# Altium PCB valix_PCB1_Layout1.PcbDoc (part 1 of 3)
Units mil, origin at the board's own origin, x right, y up, seen from the top; angles counter-clockwise.
Board outline 4500 x 2000 mil, 10 copper layers (Top Layer, L2 IntP, L3 Sig, L4 IntP GND, L5 Sig, L6 IntP GND, L7 IntP pwr, L8 Sig, L9 IntP GND, Bottom Layer), stack 81.302 mil thick; 152 components, 166 nets, 818 pads, 544 vias.
Unrouted connection lines stored in the file: 42.
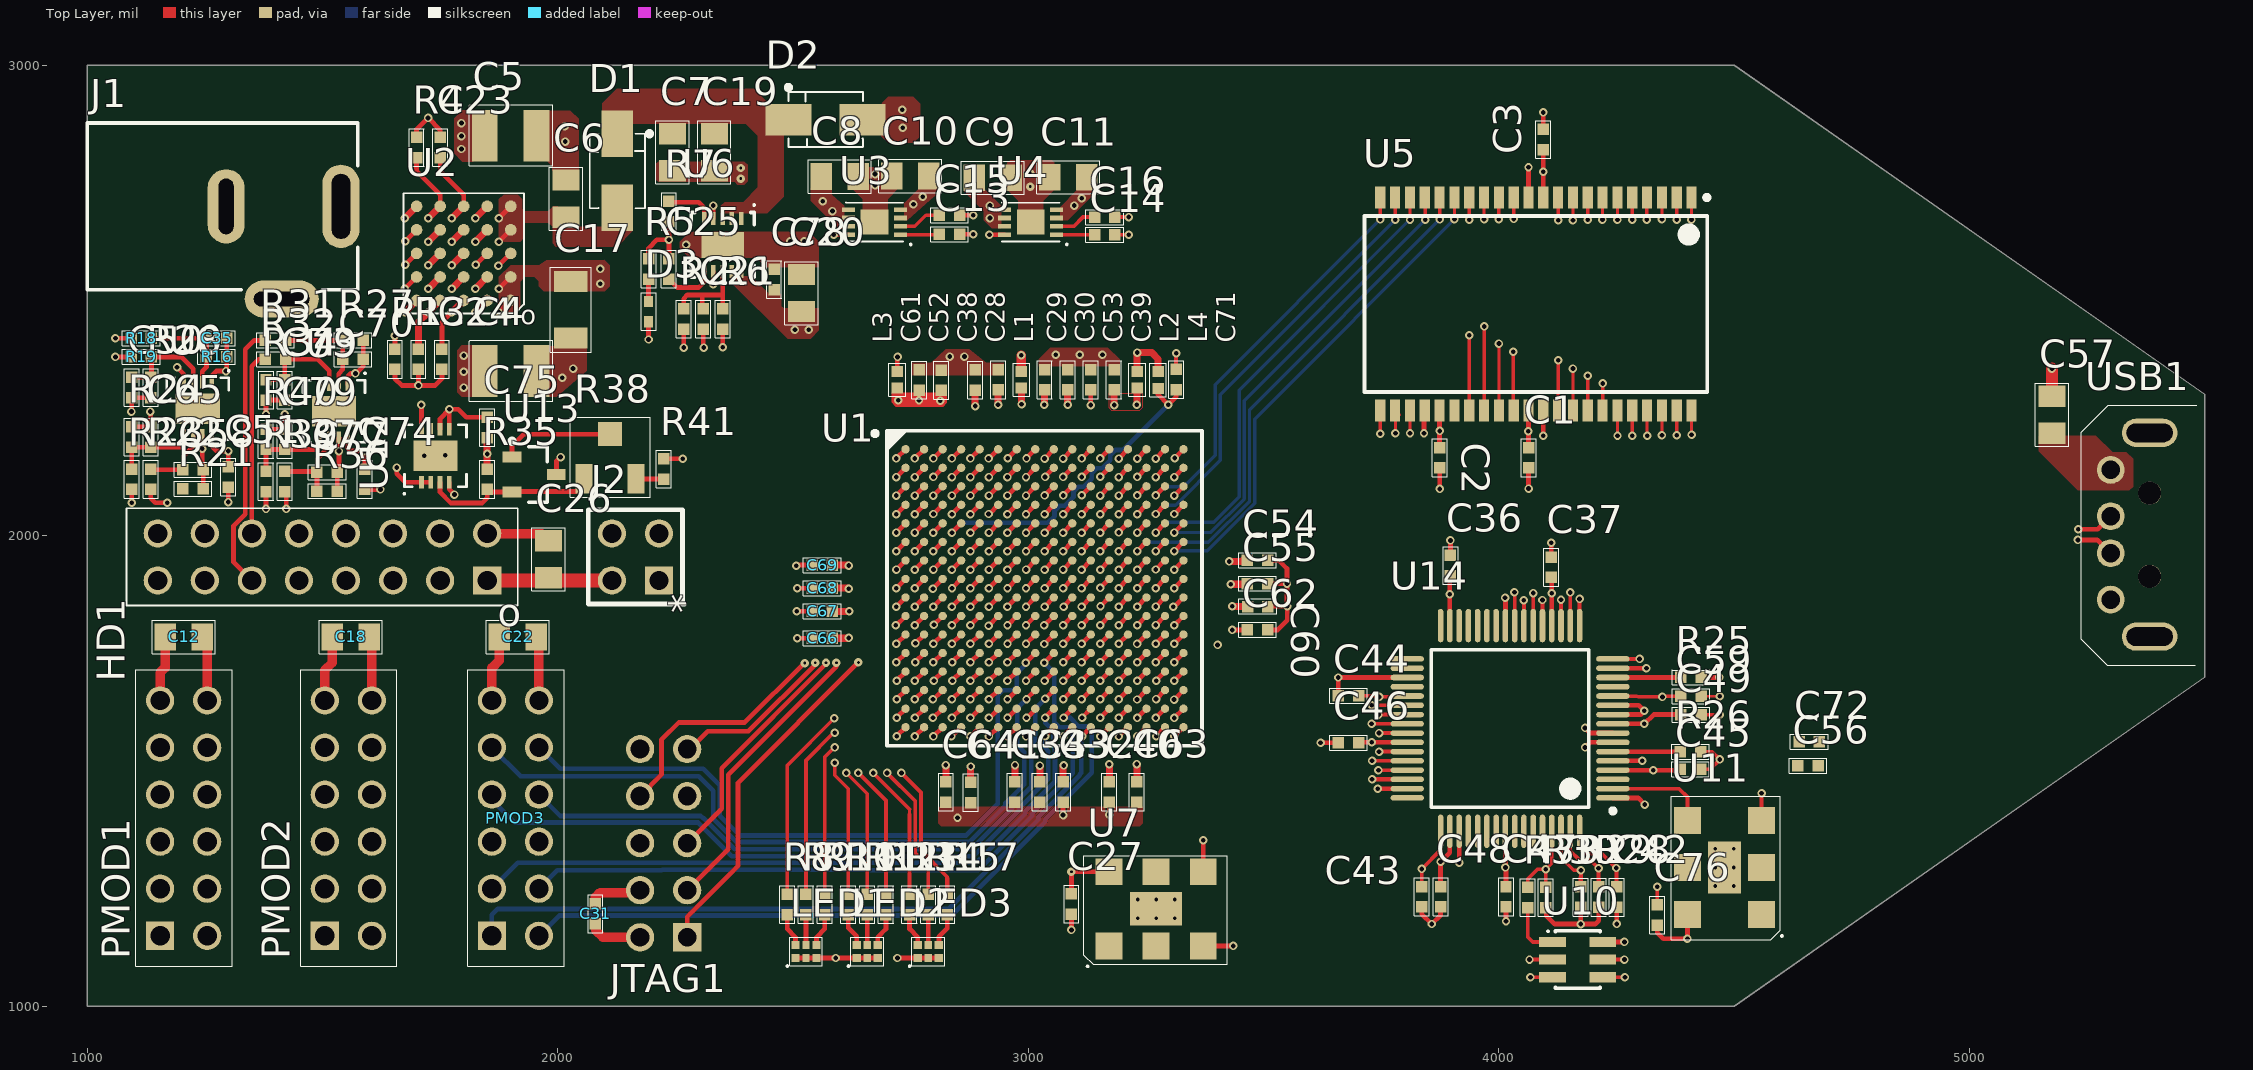
[diagram p0: Top Layer view]
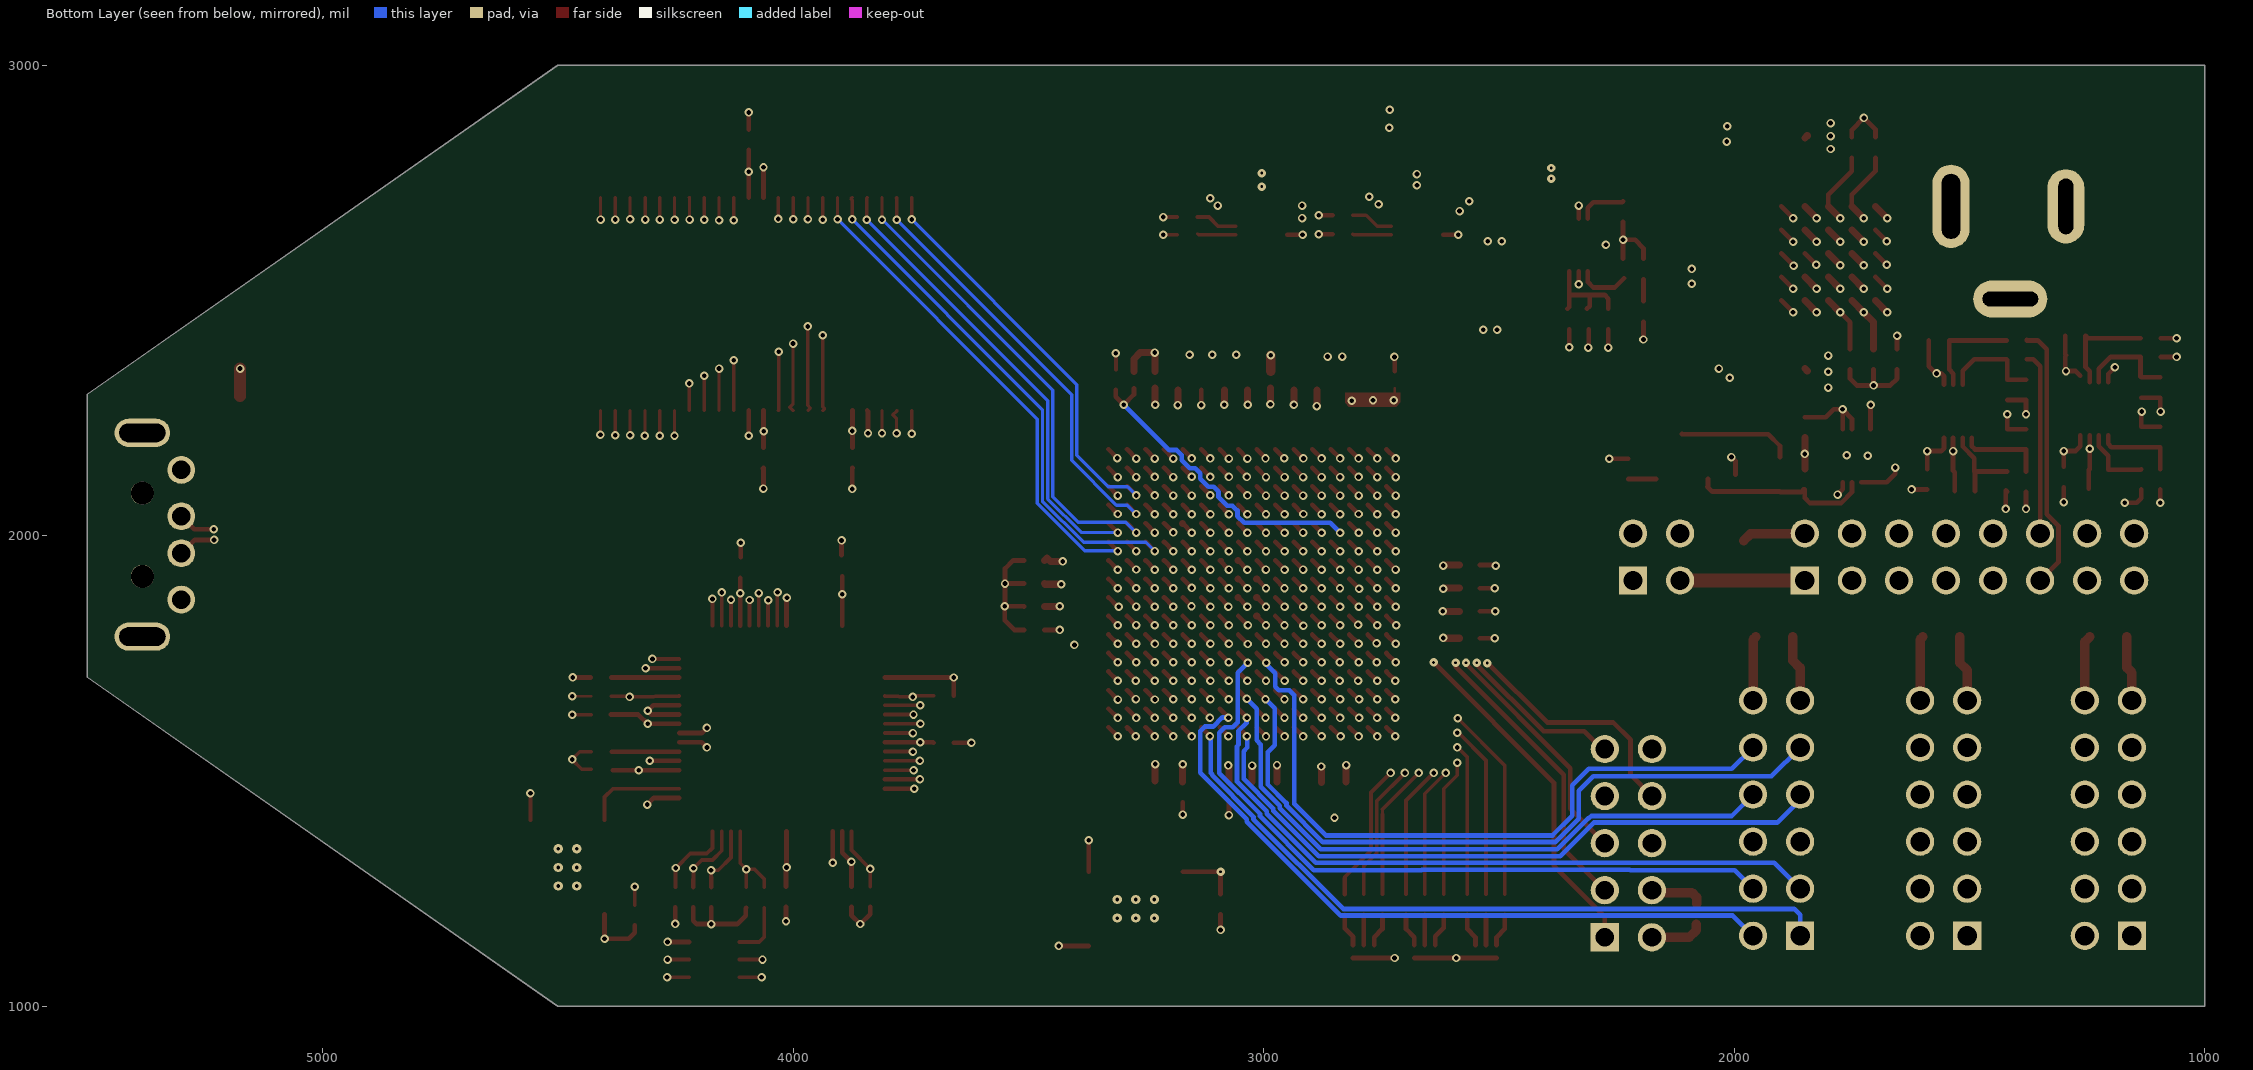
[diagram p1: Bottom Layer view, seen from below]
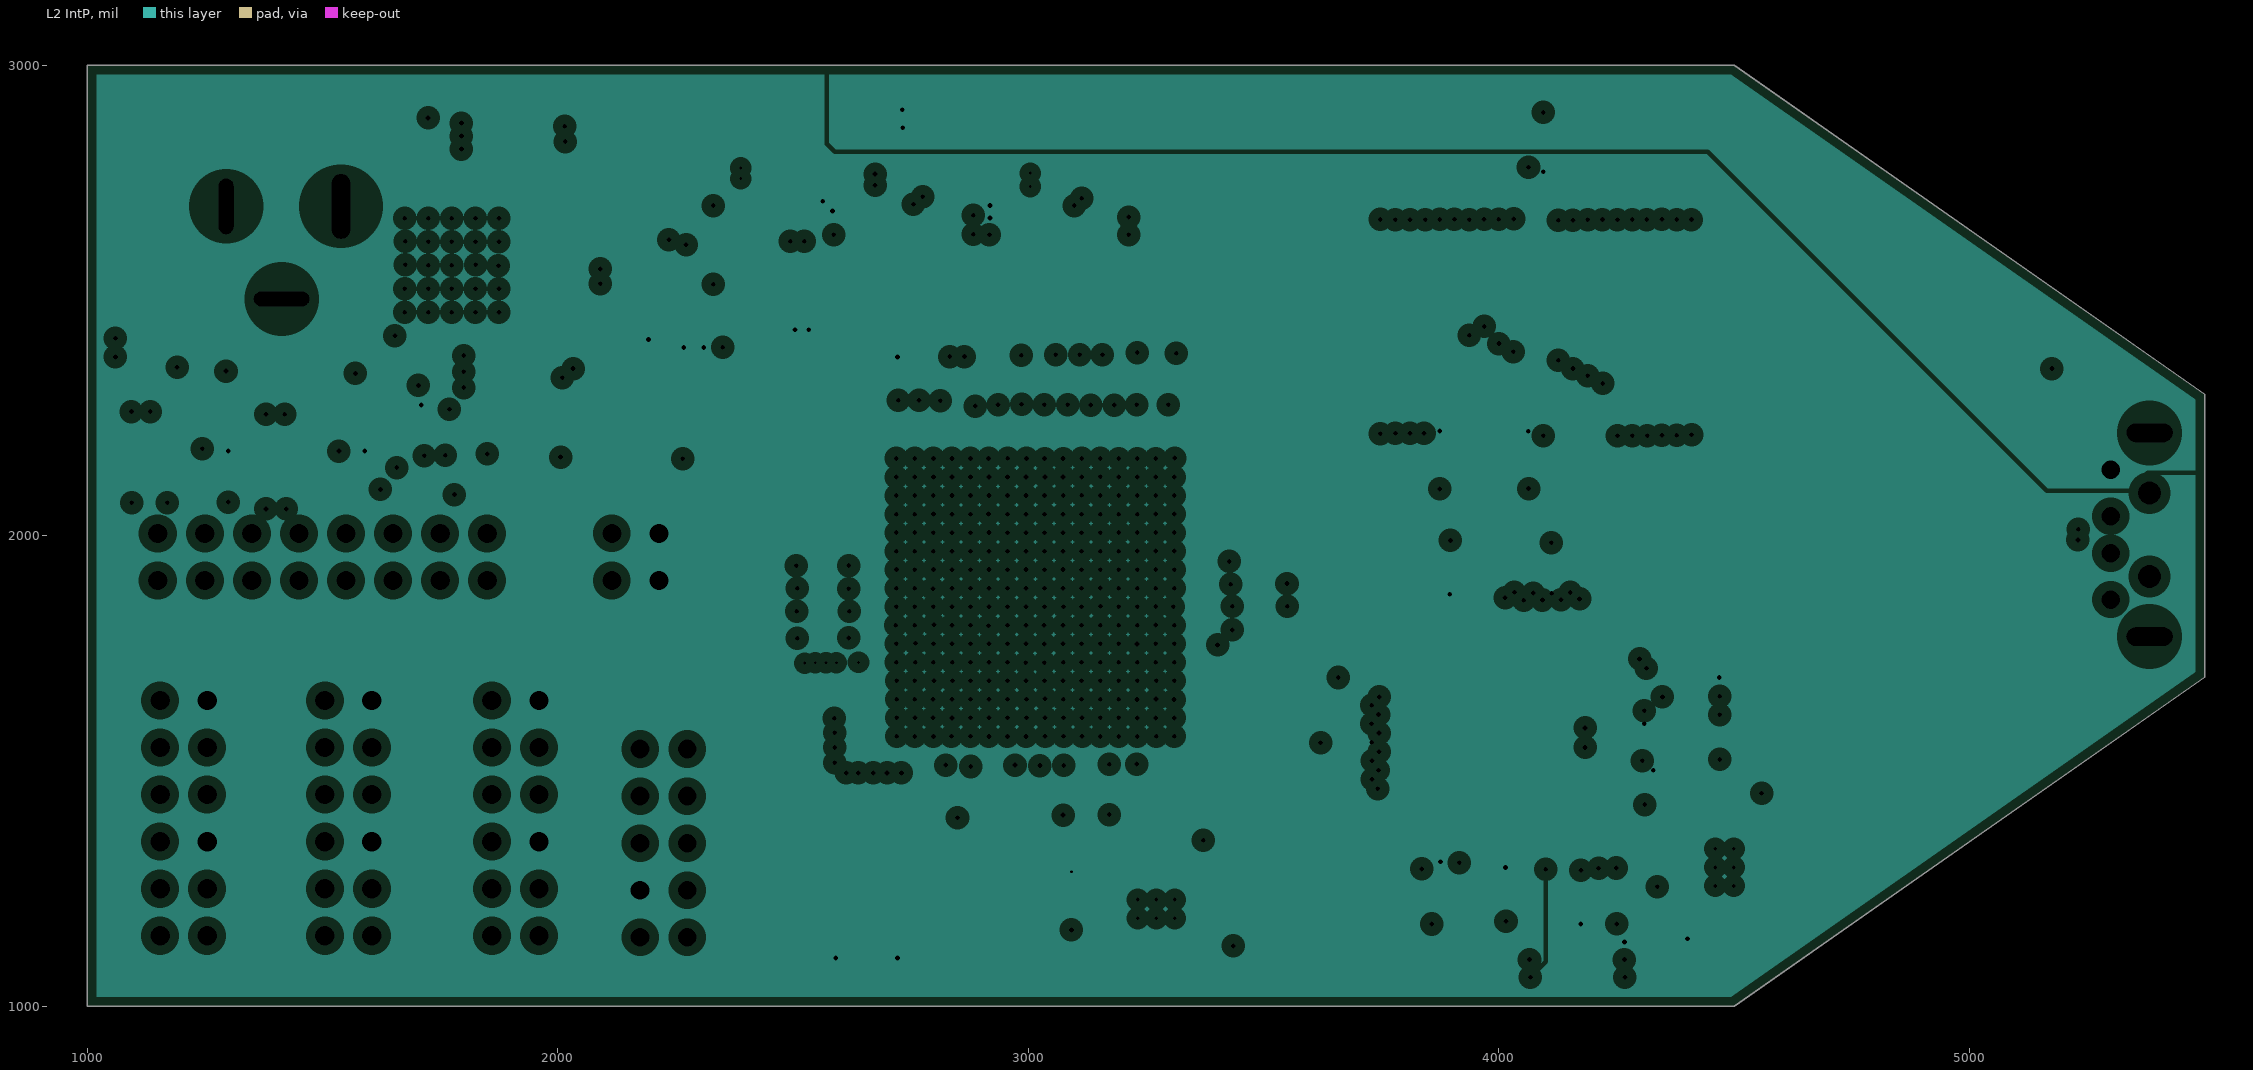
[diagram p2: L2 IntP, clearances drawn from the general rule]
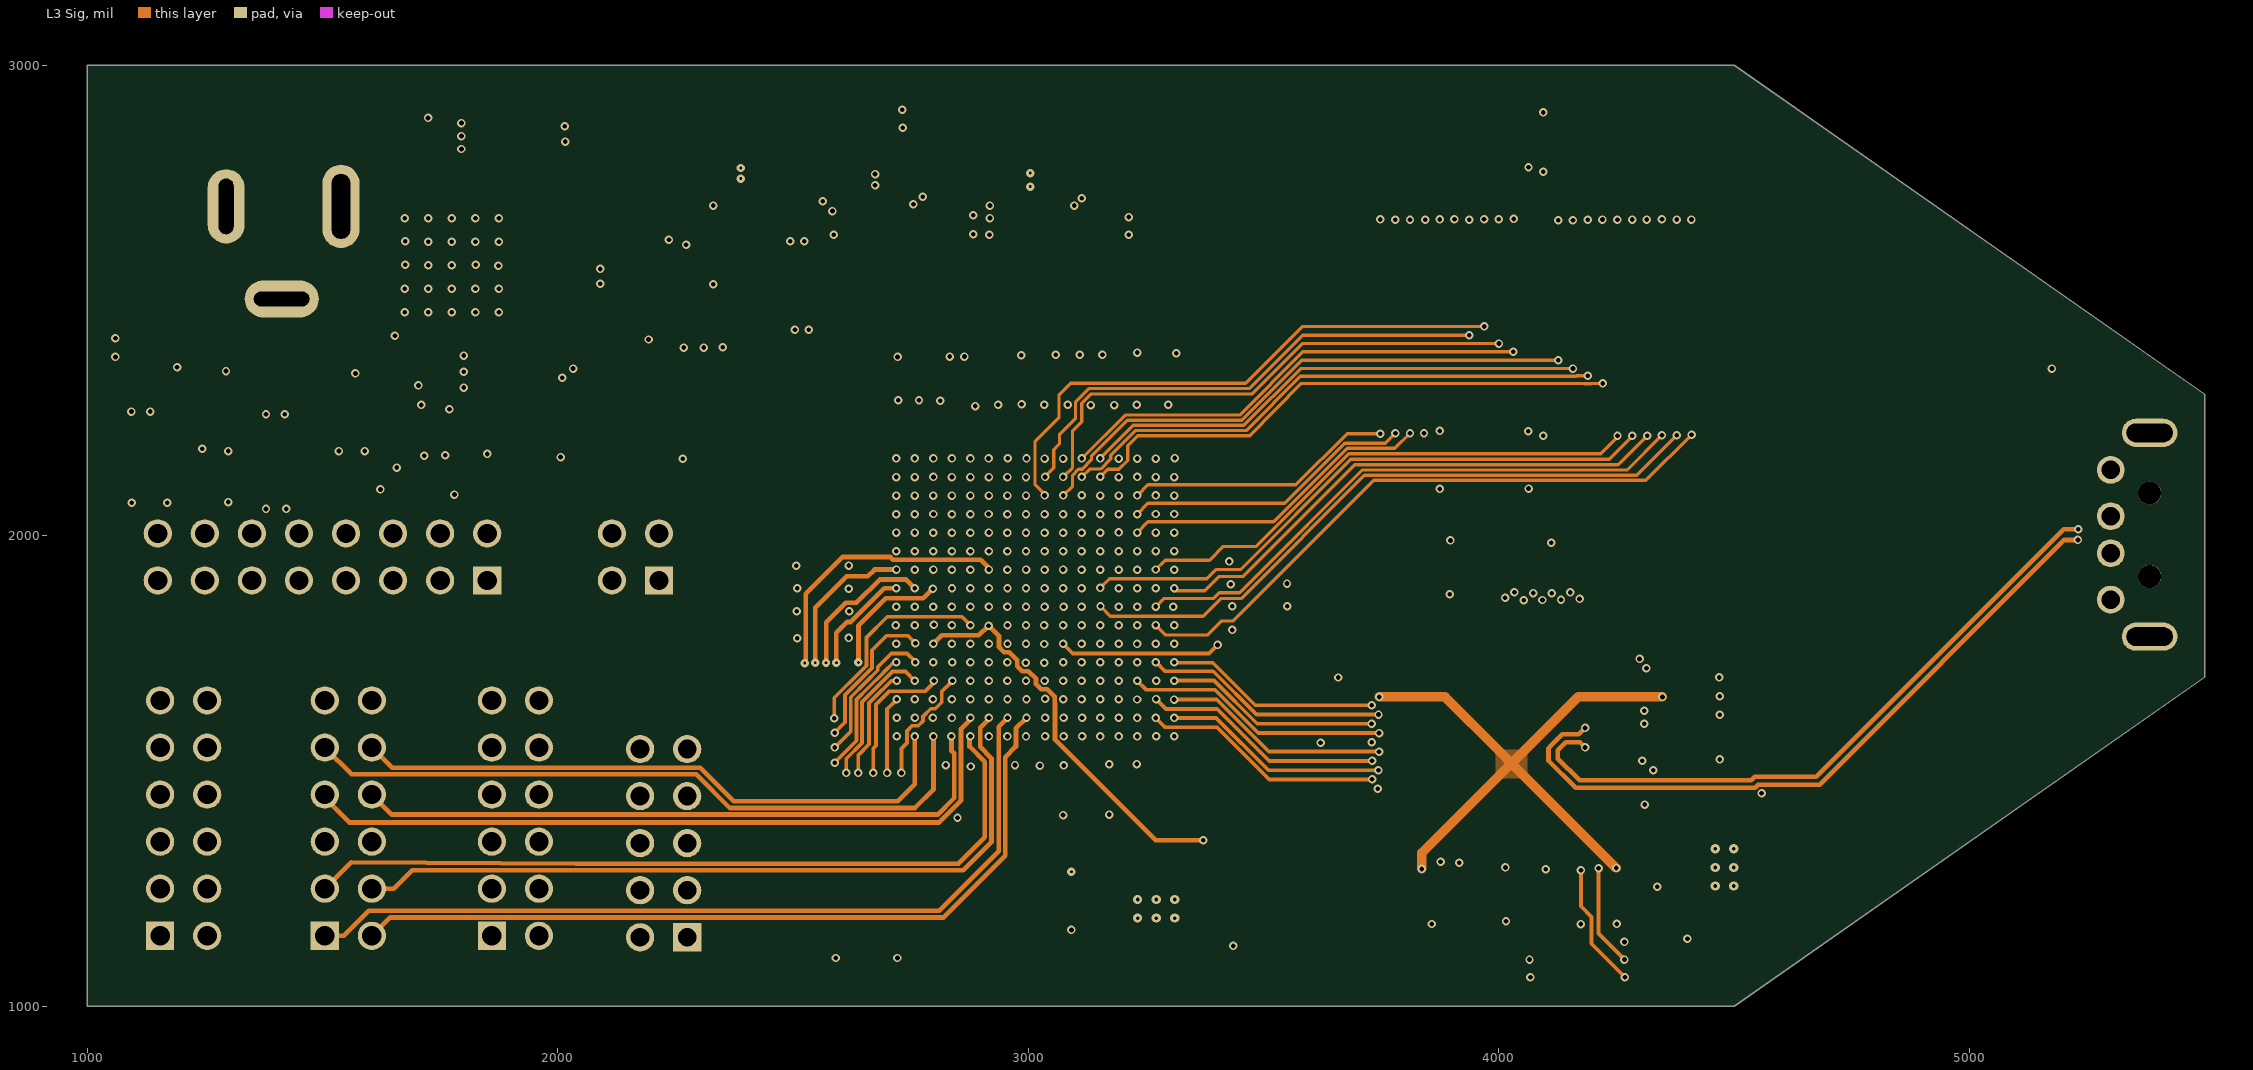
[diagram p3: L3 Sig]
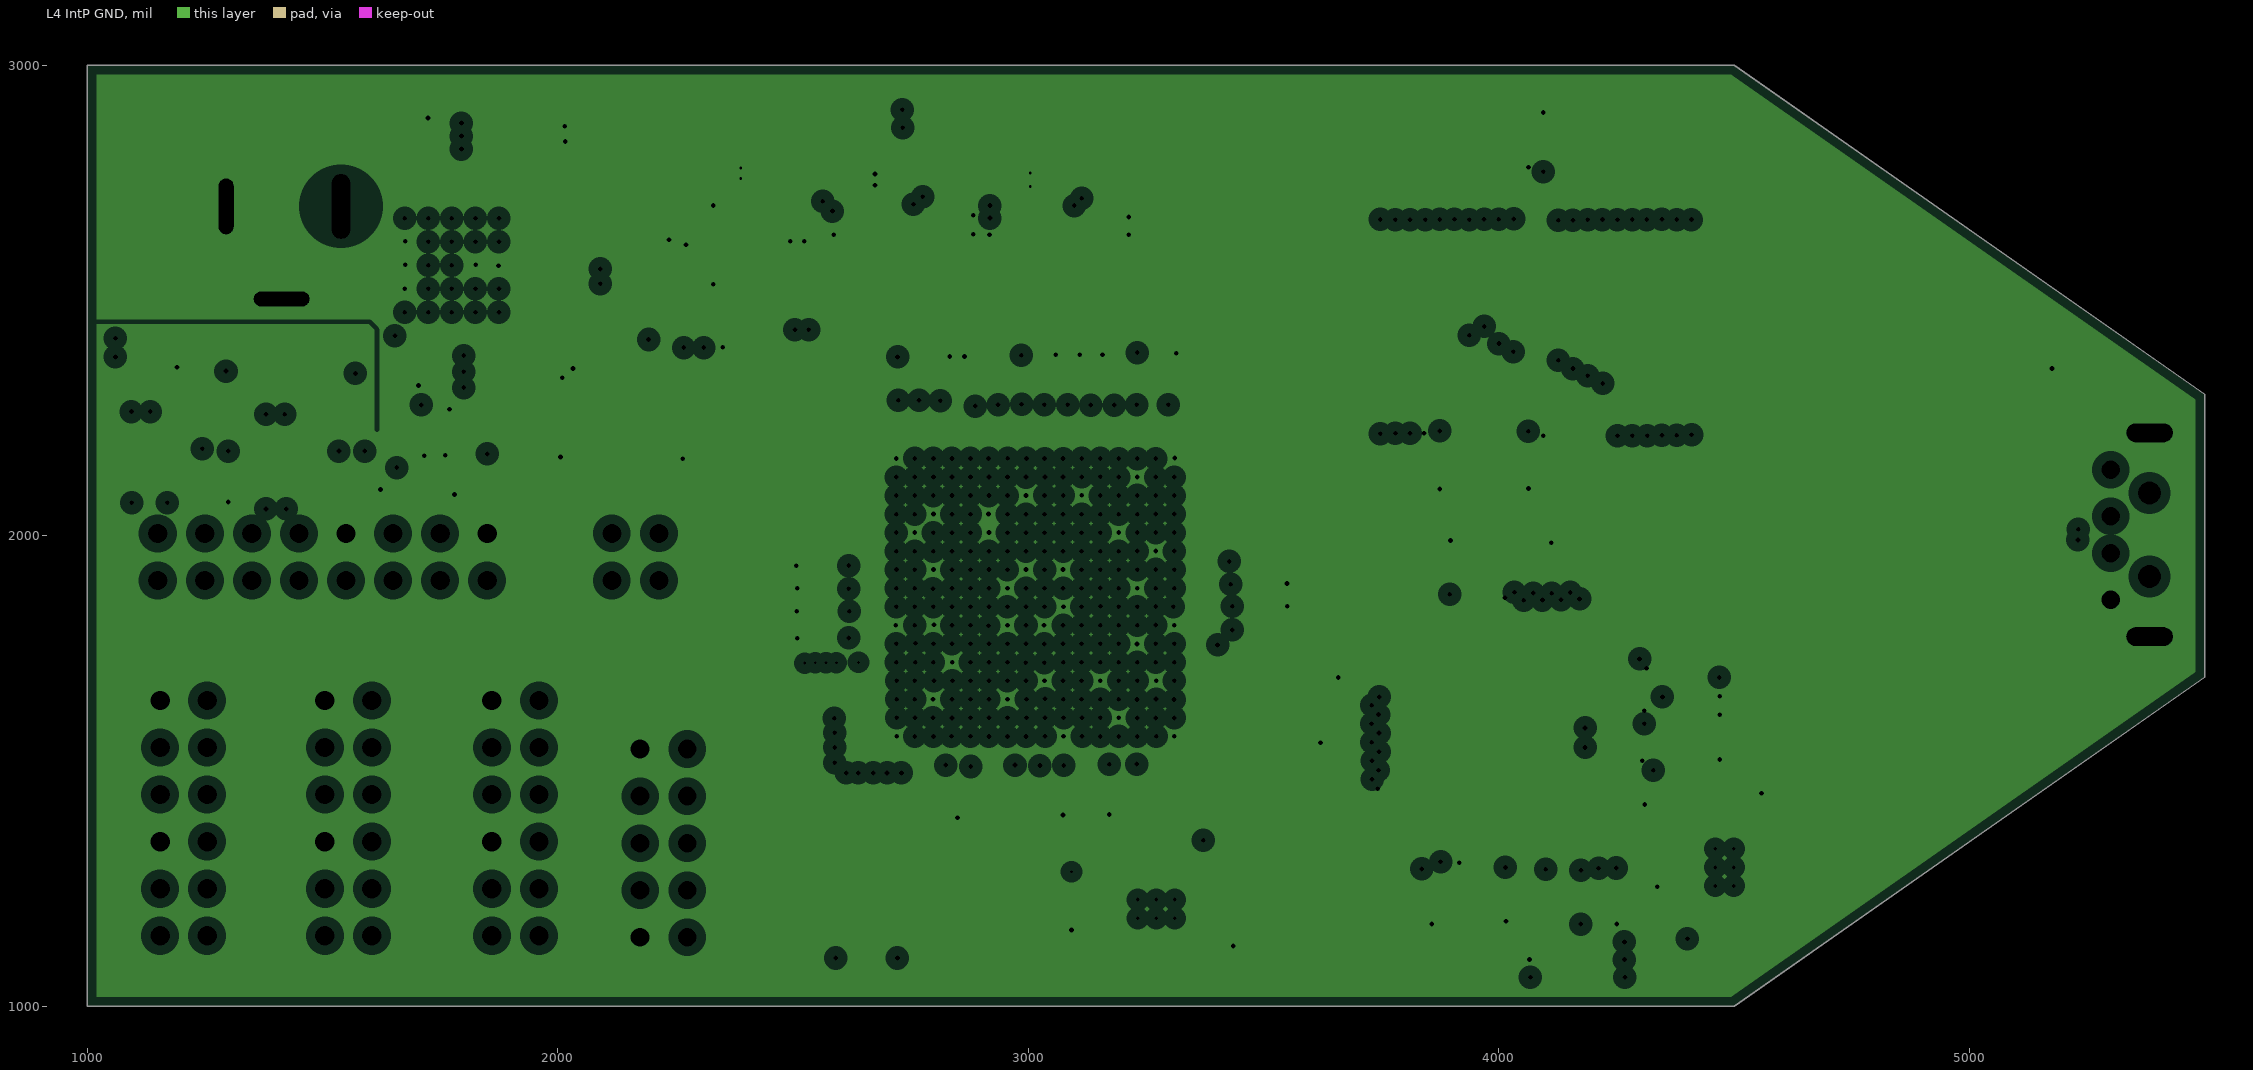
[diagram p4: L4 IntP GND, clearances drawn from the general rule]
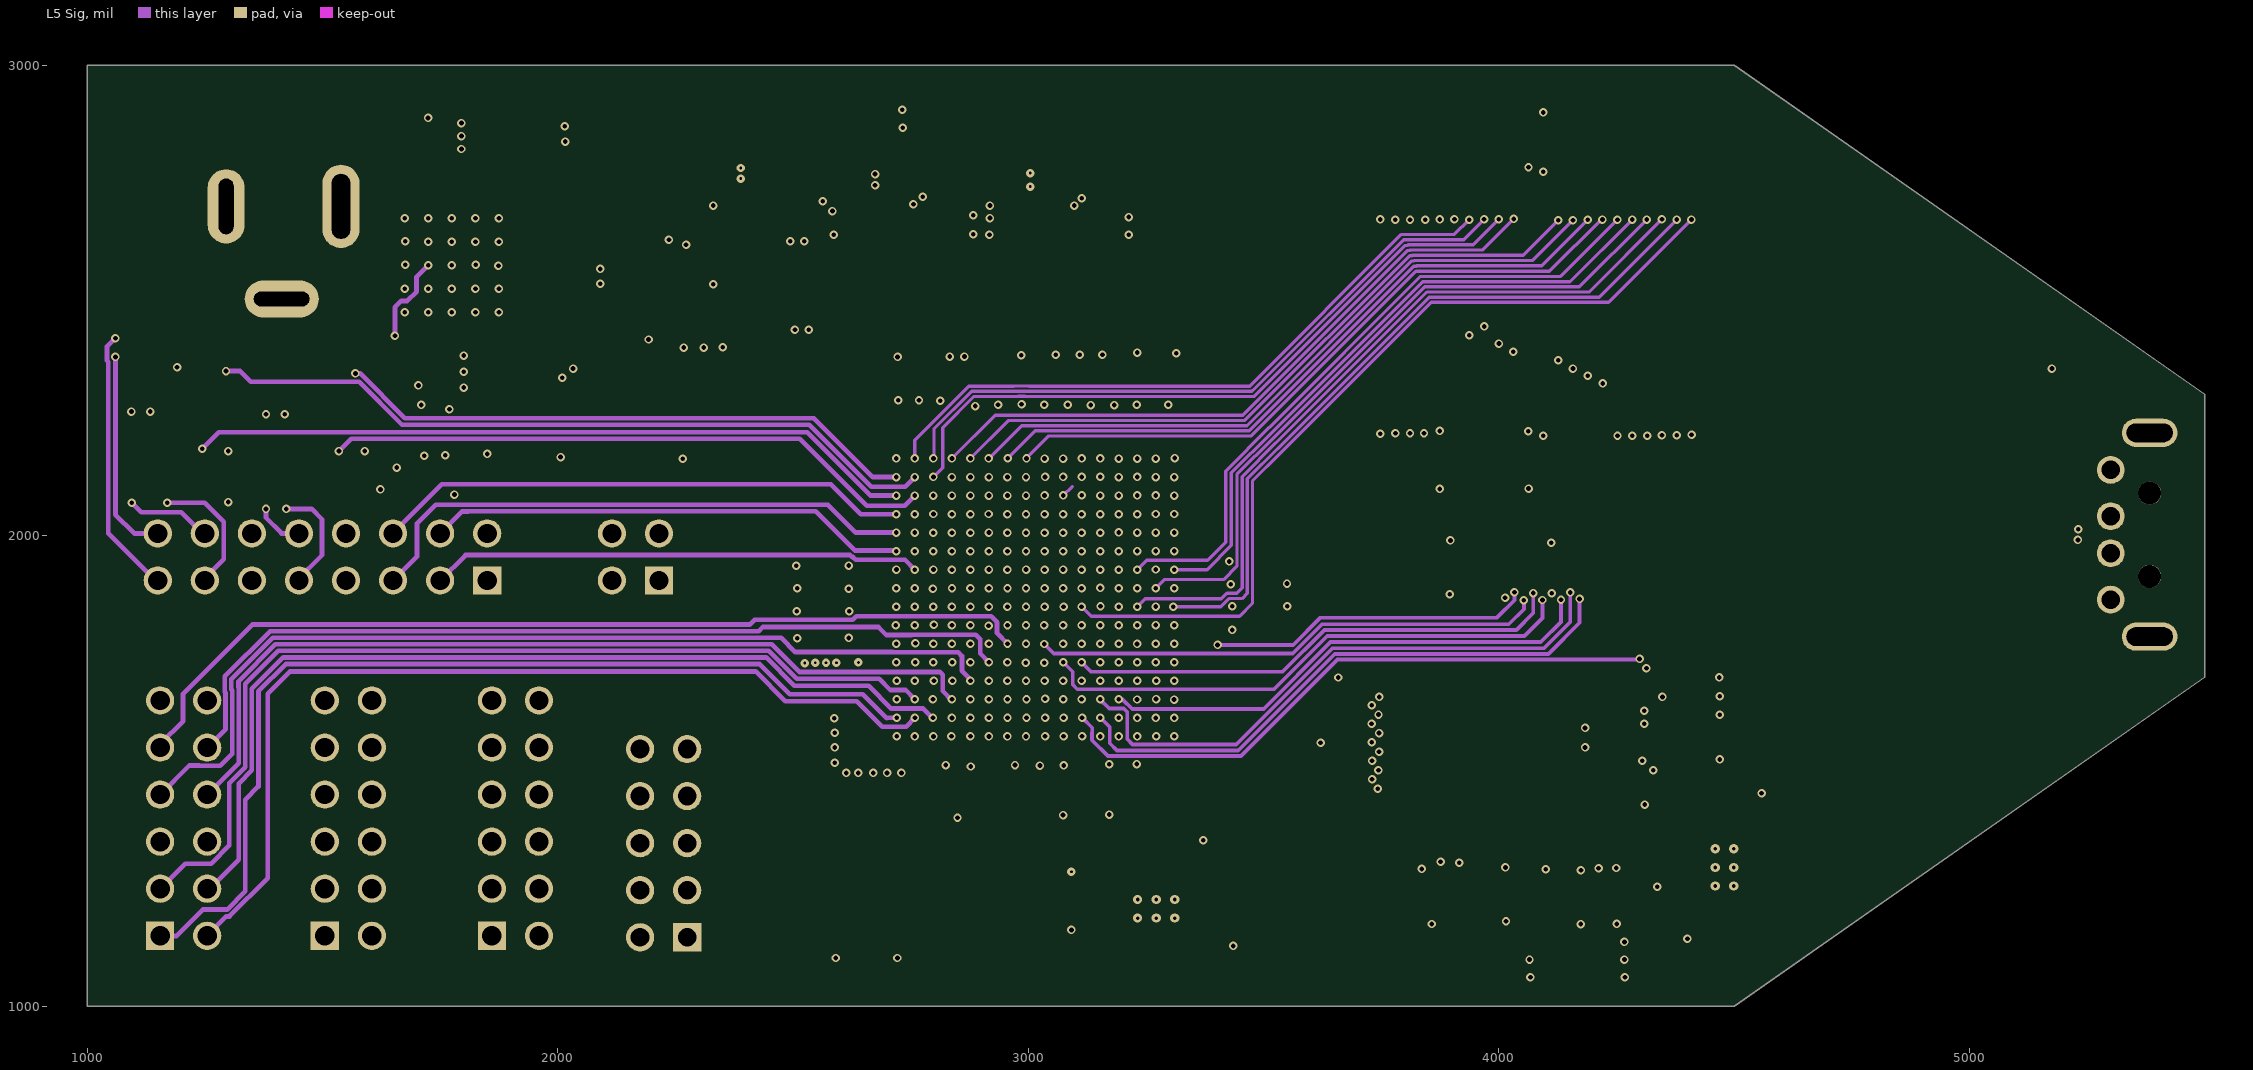
[diagram p5: L5 Sig]
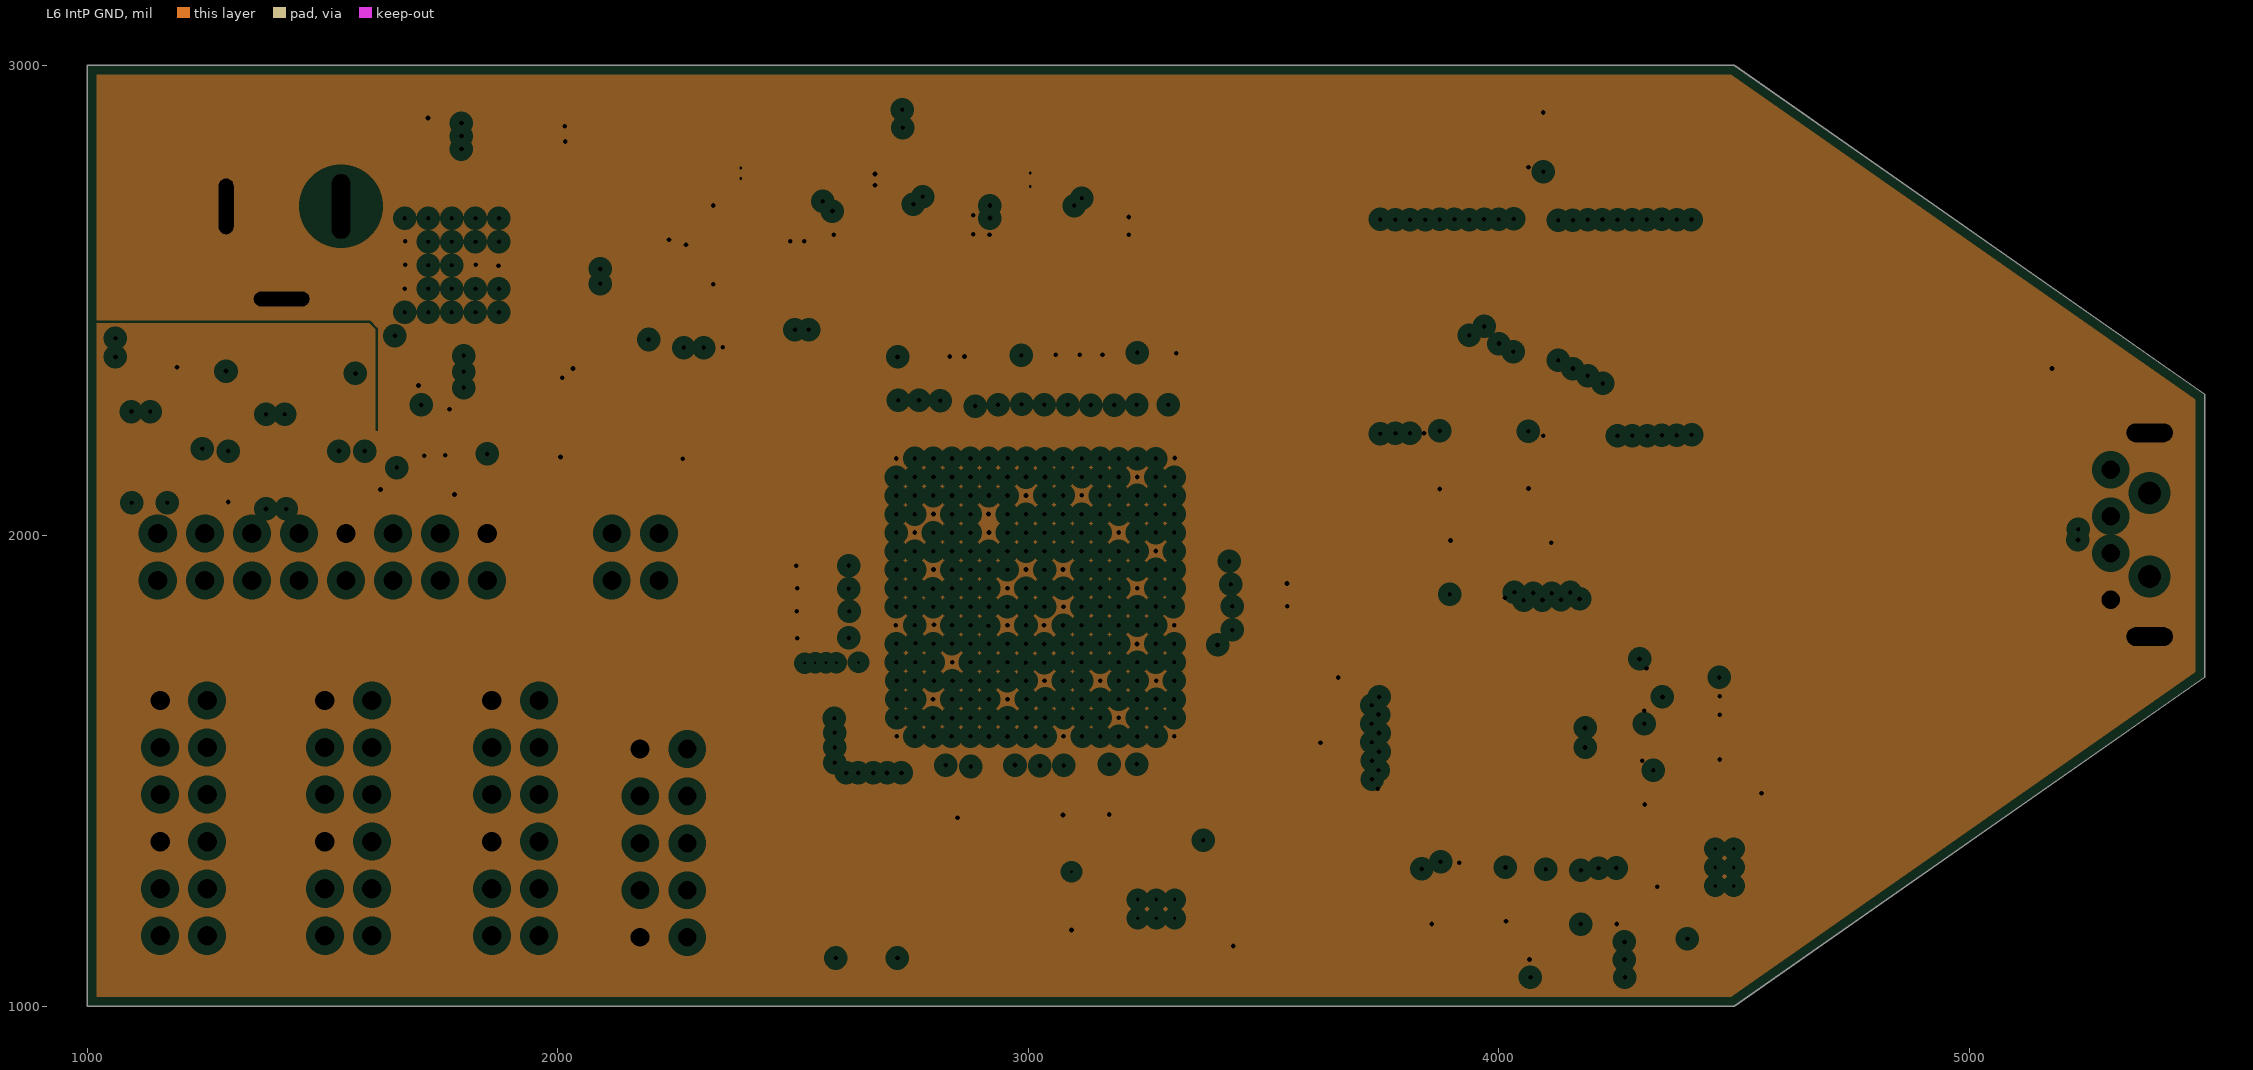
[diagram p6: L6 IntP GND, clearances drawn from the general rule]
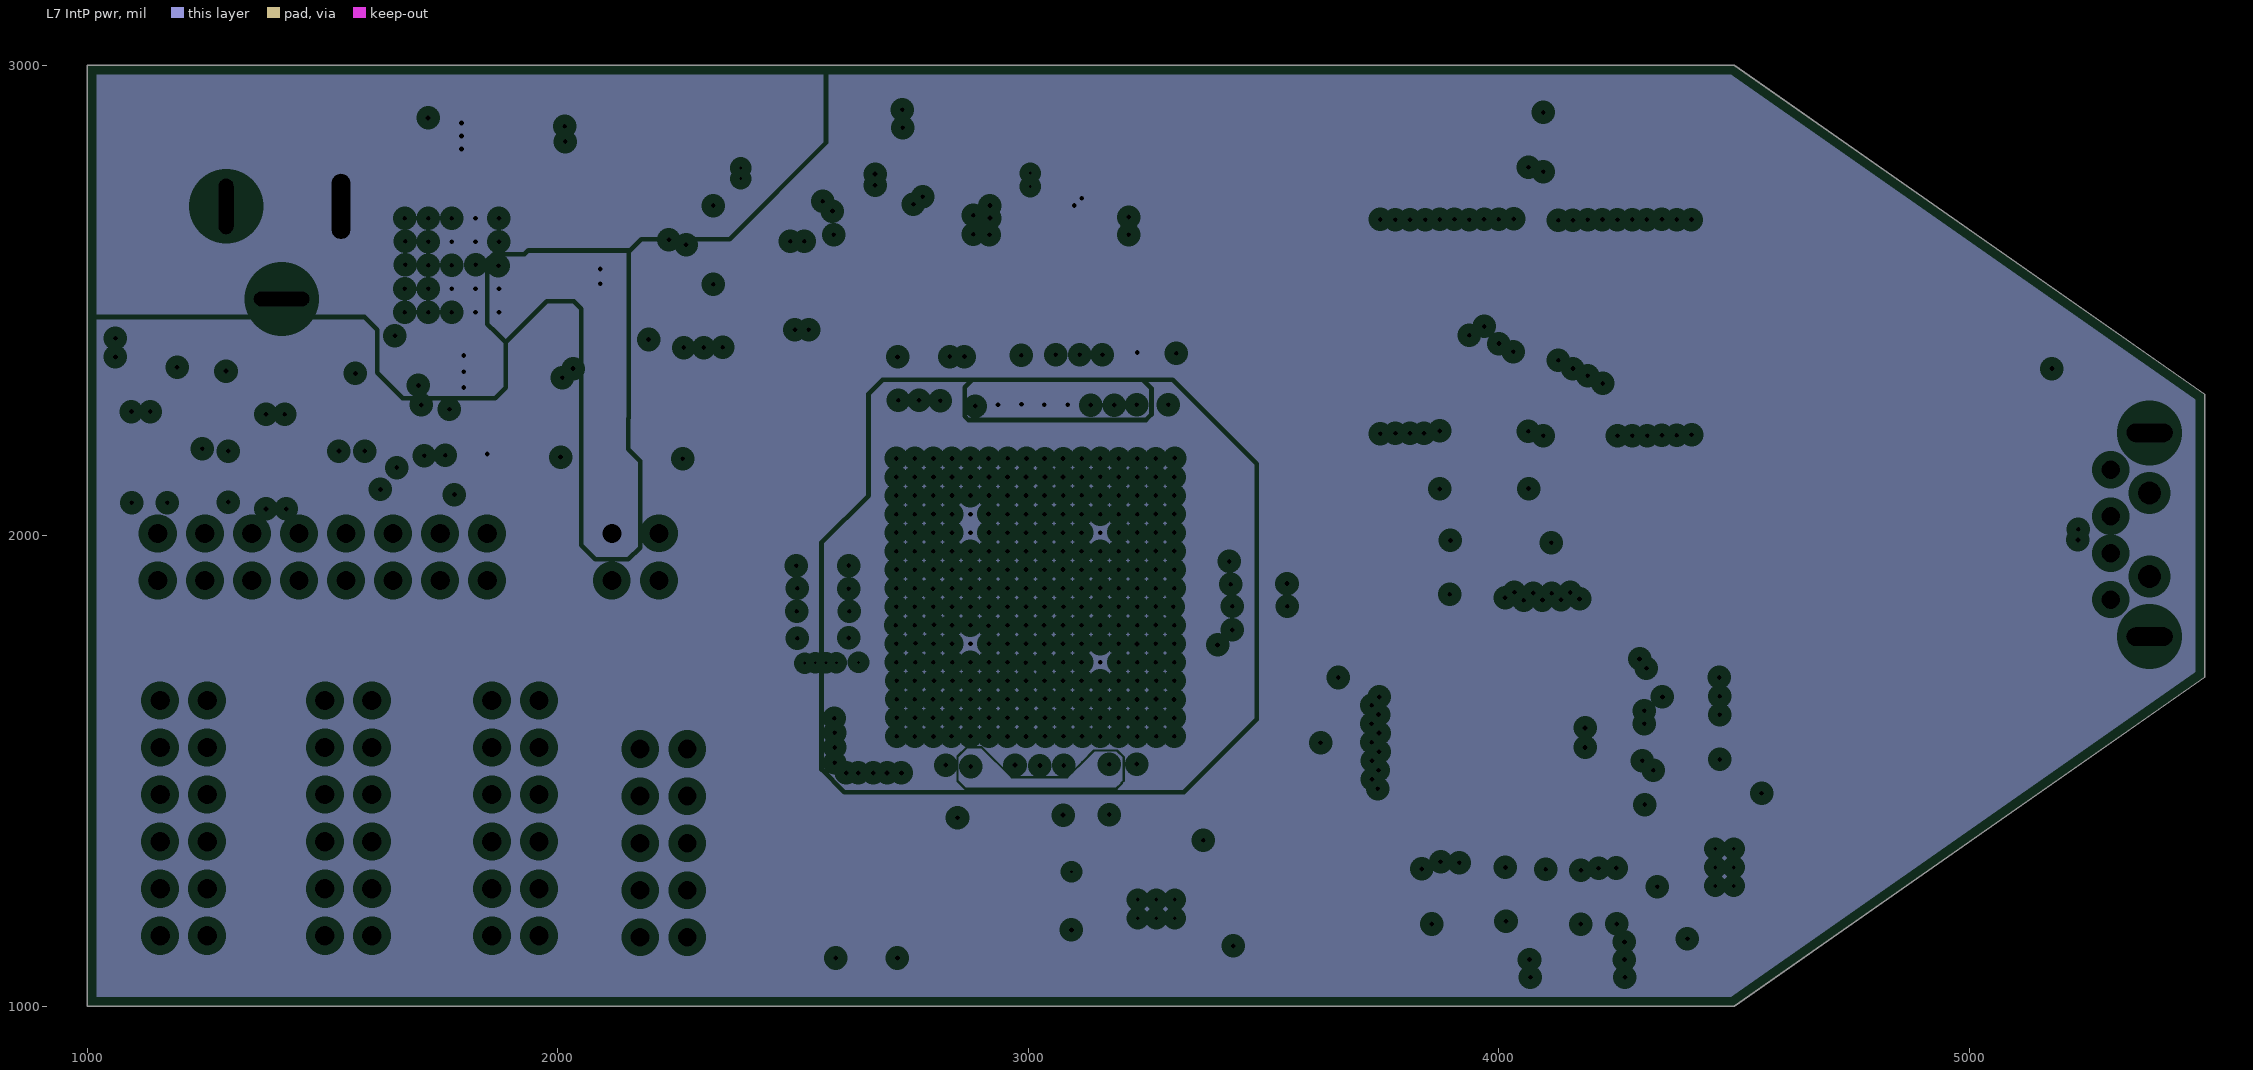
[diagram p7: L7 IntP pwr, clearances drawn from the general rule]
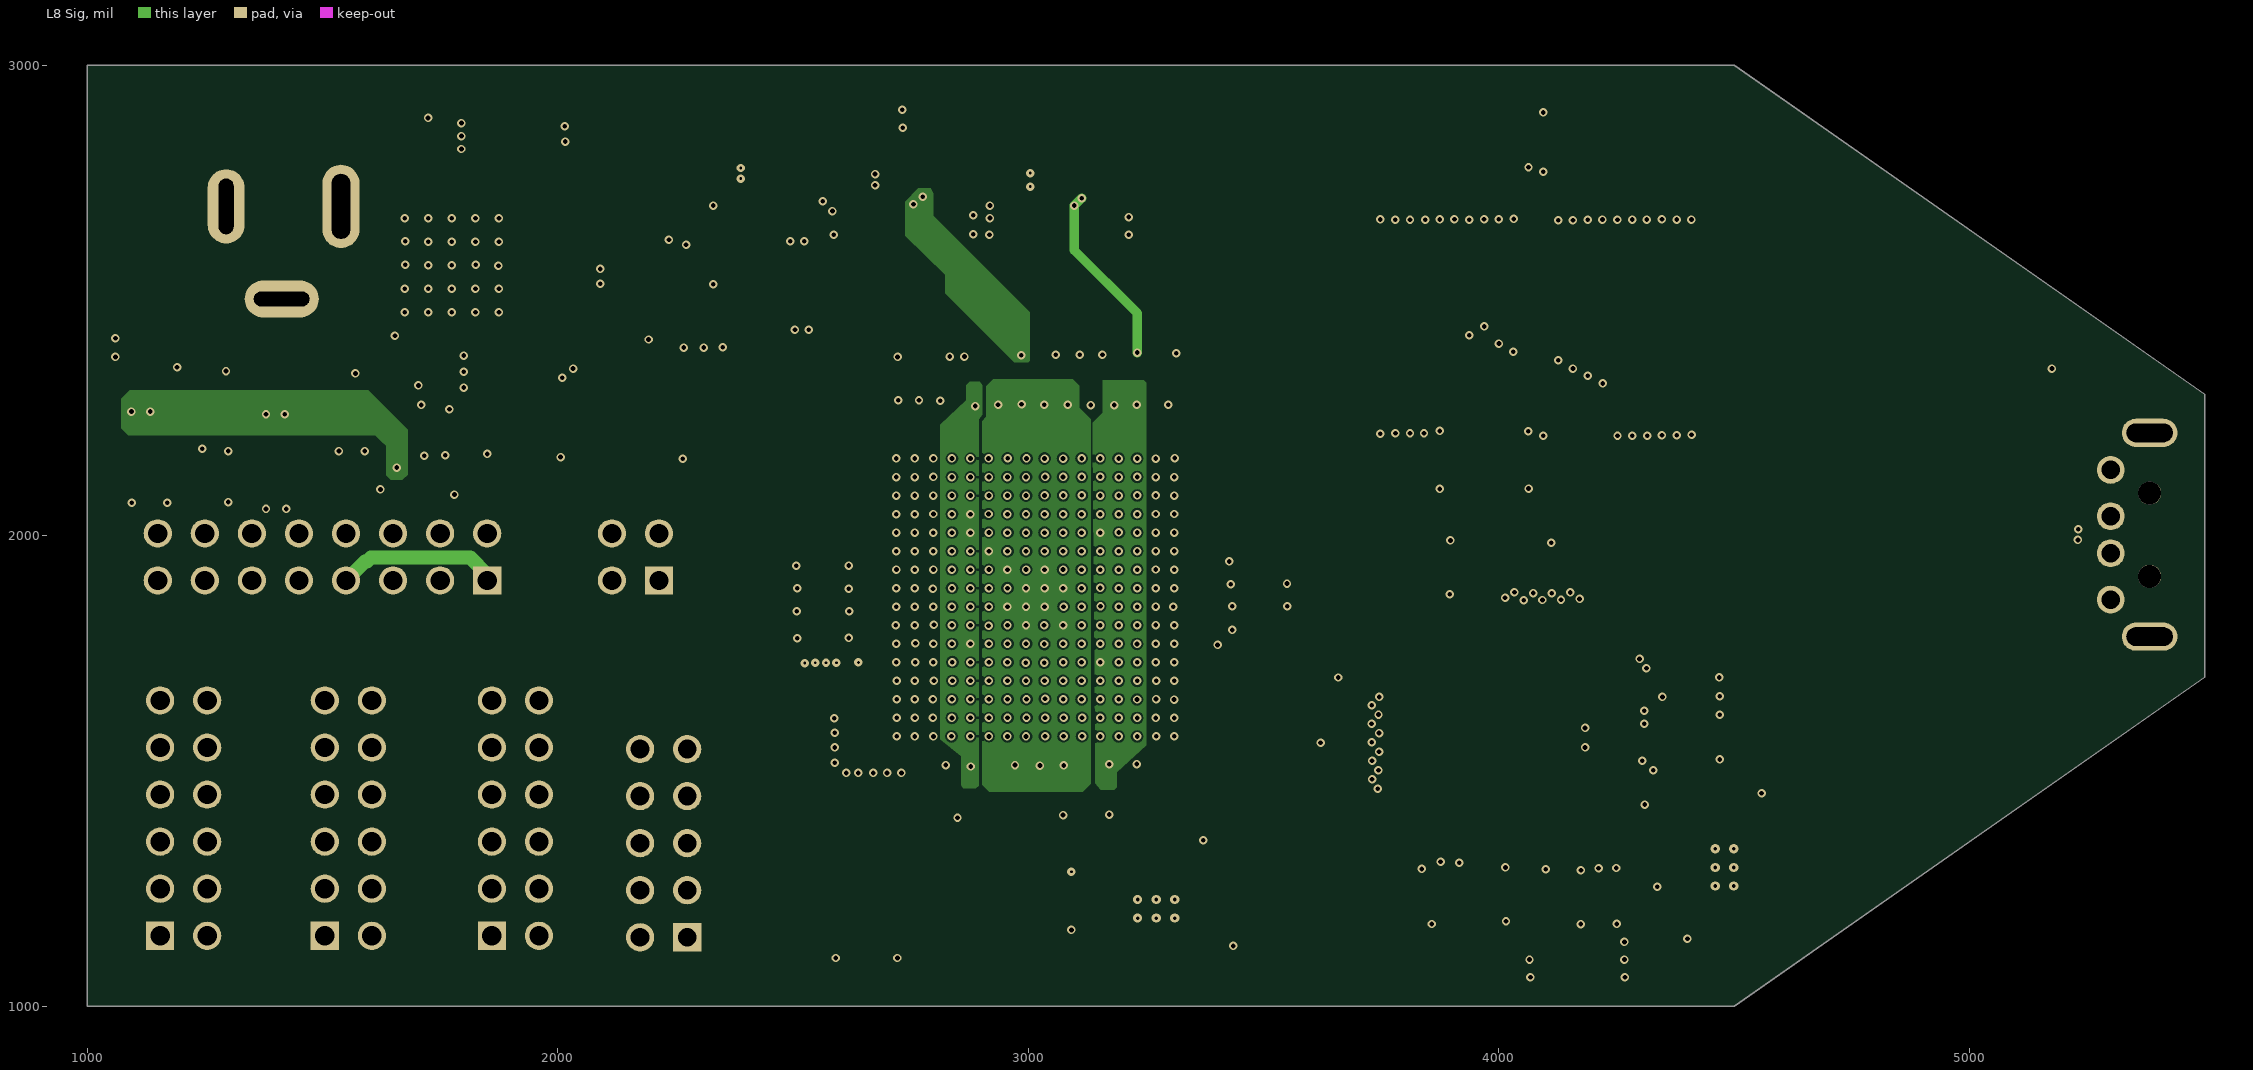
[diagram p8: L8 Sig]
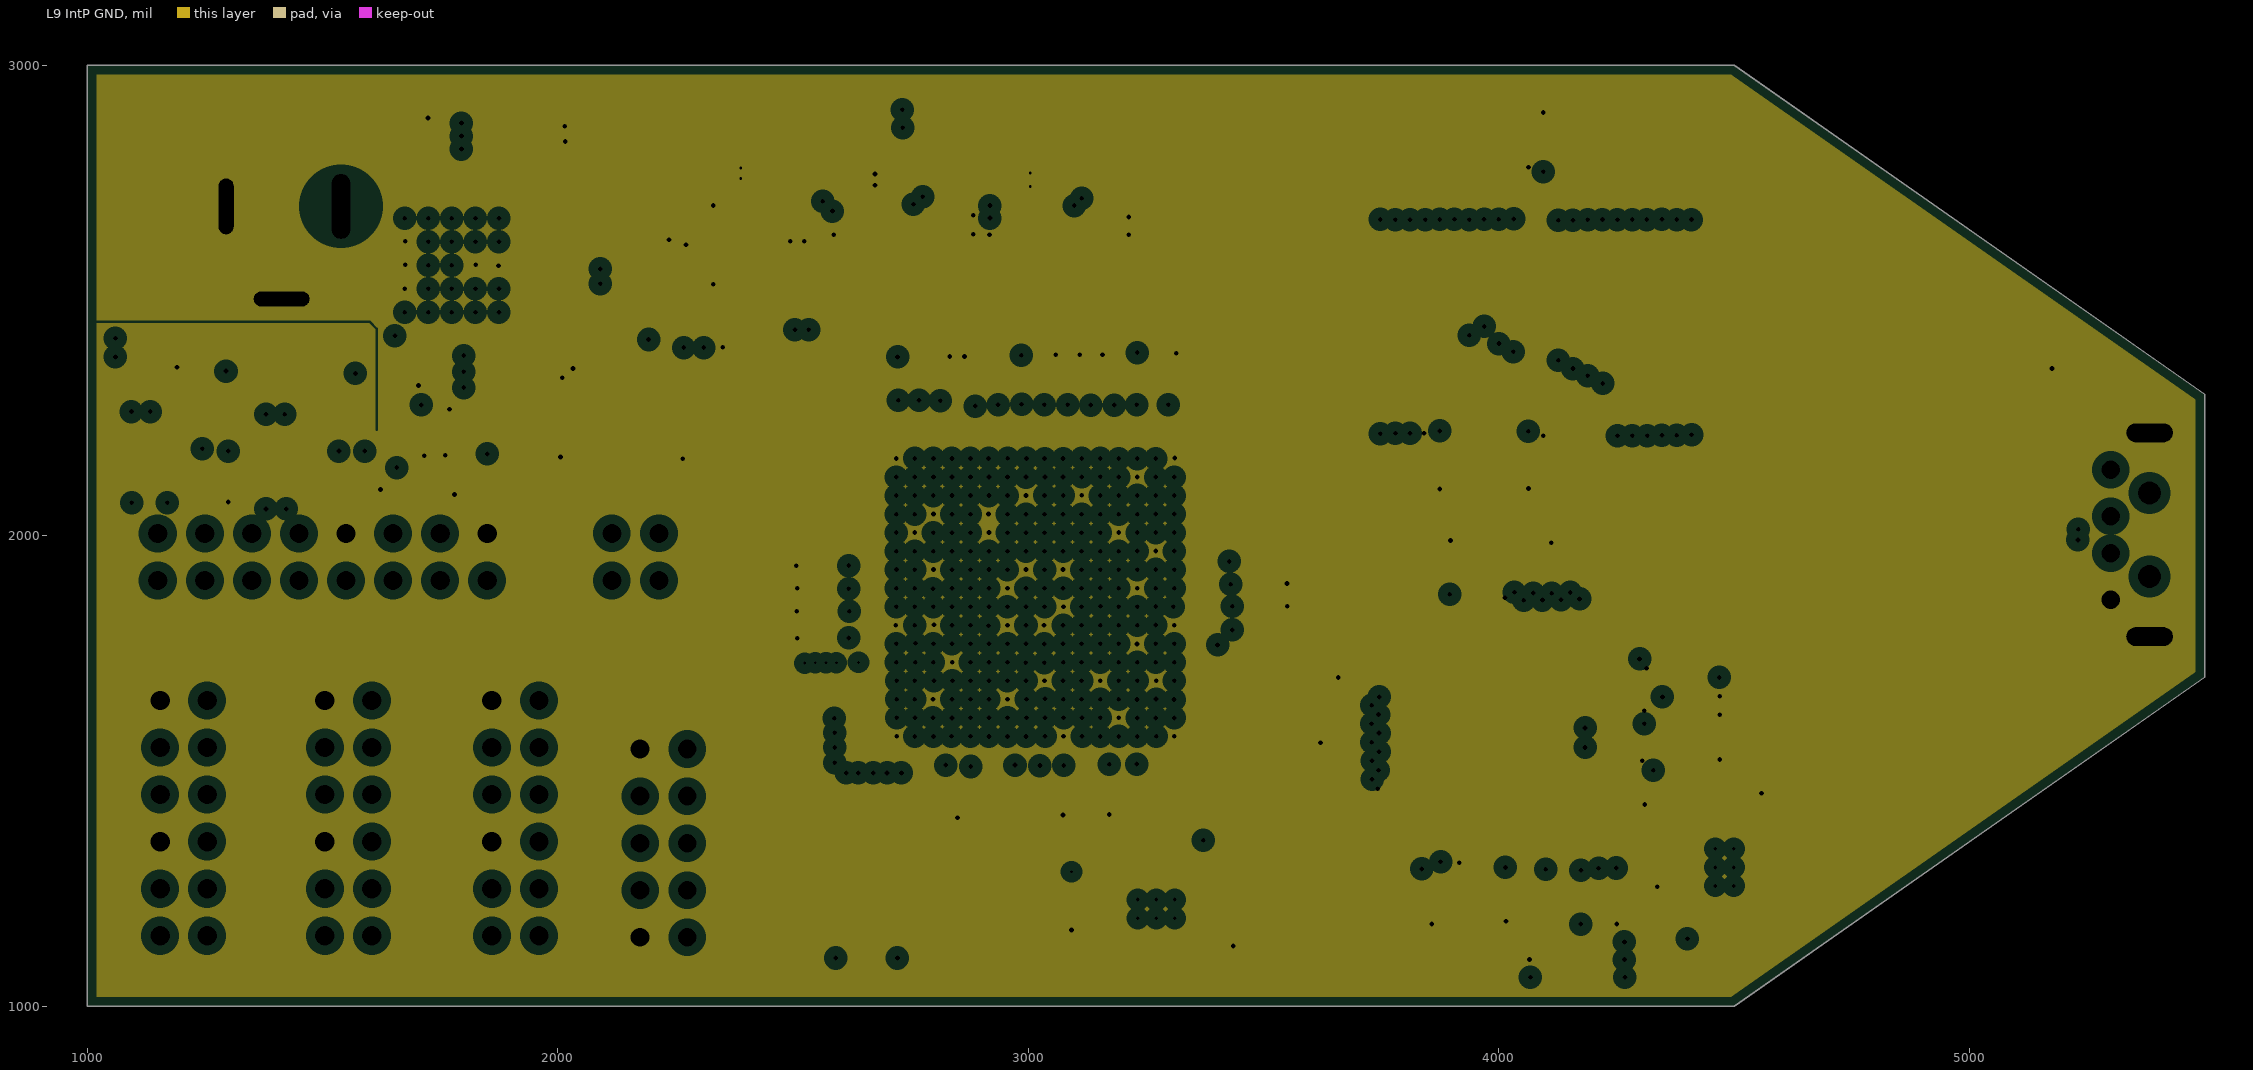
[diagram p9: L9 IntP GND, clearances drawn from the general rule]

## Layer stack, top to bottom
Top Solder: solder mask 0.4, Solder Resist, Dk 3.5
Top Layer: signal copper 0.7
Dielectric 1: core 10, FR-4, Dk 4.2
L2 IntP: plane copper 1.417, net (Multiple Nets)
Dielectric 2: core 10, Dk 4.2
L3 Sig: signal copper 1.417
Dielectric 3: prepreg 5, Dk 4.2
L4 IntP GND: plane copper 1.417, net GND
Dielectric 4: prepreg 5, Dk 4.2
L5 Sig: signal copper 0.7
Dielectric 5: core 10, Dk 4.2
L6 IntP GND: plane copper 1.417, net GND
Dielectric 6: prepreg 5, Dk 4.2
L7 IntP pwr: plane copper 1.417, net (Multiple Nets)
Dielectric 7: core 10, Dk 4.2
L8 Sig: signal copper 0.7
Dielectric 8: prepreg 5, Dk 4.2
L9 IntP GND: plane copper 1.417, net GND
Dielectric 9: core 10, Dk 4.2
Bottom Layer: signal copper 0.7
Bottom Solder: solder mask 0.4, Solder Resist, Dk 3.5

## Board outline
1000,1000 1000,3000 4500,3000 5500,2300 5500,1700 4500,1000

## Design rules (kind name [scope] priority, off if disabled: settings)
Clearance [All] p1: gap=4
DiffPairsRouting [All] p1: maxlimit=10 minlimit=7 mostfreqgap=7 toplayer_minwidth=8 toplayer_maxwidth=15 toplayer_prefwidth=10 midlayer1_minwidth=8 midlayer1_maxwidth=15 midlayer1_prefwidth=10 midlayer2_minwidth=8 midlayer2_maxwidth=15 midlayer2_prefwidth=10 midlayer3_minwidth=8 midlayer3_maxwidth=15 midlayer3_prefwidth=10 bottomlayer_minwidth=8 bottomlayer_maxwidth=15 bottomlayer_prefwidth=10 maxuncoupledlength=500
HoleSize [All] p1: absolutevalues=TRUE maxlimit=100 minlimit=10 maxpercent=80.000 minpercent=20.000
PlaneClearance PlaneClearance_1 [All] p1: clearance=20
PlaneConnect PlaneConnect_2p5FPGA [IsVia and InNet('2P5V_FPGA')] p1: planeconnectstyle=Direct reliefexpansion=20 reliefentries=4 reliefconductorwidth=10 reliefairgap=10
PlaneConnect PlaneConnect_5VINT [IsVia and InNet('5VINT')] p2: planeconnectstyle=Direct reliefexpansion=20 reliefentries=4 reliefconductorwidth=10 reliefairgap=10
PlaneConnect PlaneConnect_vbuss [IsVia and InNet('VBUSS')] p3: planeconnectstyle=Direct reliefexpansion=20 reliefentries=4 reliefconductorwidth=10 reliefairgap=10
PlaneConnect PlaneConnect_vbuss_hole [IsPad and InNet('GND')] p4: planeconnectstyle=Relief reliefexpansion=20 reliefentries=4 reliefconductorwidth=20 reliefairgap=10
PlaneConnect PlaneConnect_gnd [IsVia and InNet('GND') or IsPad and InNet ('GND')] p5: planeconnectstyle=Direct reliefexpansion=20 reliefentries=4 reliefconductorwidth=10 reliefairgap=10
PlaneConnect PlaneConnect_3p3FPGA [IsVia and InNet('3P3V_FPGA')] p6: planeconnectstyle=Direct reliefexpansion=20 reliefentries=4 reliefconductorwidth=10 reliefairgap=10
PlaneConnect PlaneConnect_PWR [InNetClass('All Nets')] p7: planeconnectstyle=Direct reliefexpansion=20 reliefentries=4 reliefconductorwidth=10 reliefairgap=10
PlaneConnect PlaneConnect_General [All] p8: planeconnectstyle=Relief reliefexpansion=20 reliefentries=4 reliefconductorwidth=10 reliefairgap=10
PolygonConnect PolygonConnect_Net [IsPad and InNetClass('SMTNets') Or IsPad and InNet ('SMTNets') or IsPad and InNet('4.5V') or IsPad and InNet('5VINT')] p1: connectstyle=Direct reliefconductorwidth=10 reliefentries=4 polygonreliefangle="90 Angle" airgapwidth=10
PolygonConnect PolygonConnect_gnd [IsVia and InNet('GND') Or IsPad and InNet ('GND')] p2: connectstyle=Direct reliefconductorwidth=10 reliefentries=4 polygonreliefangle="90 Angle" airgapwidth=10
PolygonConnect PolygonConnect_1p2FPGA [IsVia and InNet('1P2V_FPGA') or IsPad and InNet('1.2V') or IsVia and InNet('1.2V')] p3: connectstyle=Direct reliefconductorwidth=10 reliefentries=4 polygonreliefangle="90 Angle" airgapwidth=10
PolygonConnect PolygonConnect_vREFid [IsVia and InNet('VREF_ID')] p4: connectstyle=Direct reliefconductorwidth=10 reliefentries=4 polygonreliefangle="90 Angle" airgapwidth=10
PolygonConnect PolygonConnect_5vint [IsVia and InNet('5VINT') or IsVia and InNet('5V_USB') or IsPad and InNet('5V_USB')] p5: connectstyle=Direct reliefconductorwidth=10 reliefentries=4 polygonreliefangle="90 Angle" airgapwidth=10
PolygonConnect PolygonConnect_Vbuss [IsVia and InNet('VBUSS') or IsPad and InNet('VBUSS')] p6: connectstyle=Direct reliefconductorwidth=10 reliefentries=4 polygonreliefangle="90 Angle" airgapwidth=10
PolygonConnect PolygonConnect_3p3FPGA [IsVia and InNet('3p3V_FPGA')] p7: connectstyle=Direct reliefconductorwidth=10 reliefentries=4 polygonreliefangle="90 Angle" airgapwidth=10
PolygonConnect PolygonConnect_3p3v [IsVia and InNet('3.3V') or IsPad and InNet('3.3VEXT') or IsPad and InNet('3.3V') or IsVia and InNet('3.3VEXT')] p8: connectstyle=Direct reliefconductorwidth=10 reliefentries=4 polygonreliefangle="90 Angle" airgapwidth=10
PolygonConnect PolygonConnect_2p5 [IsVia and InNet('2P5V_FPGA') or IsPad and InNet('2.5V') or IsVia and InNet('2.5V')] p9: connectstyle=Direct reliefconductorwidth=10 reliefentries=4 polygonreliefangle="90 Angle" airgapwidth=10
PolygonConnect PolygonConnect_general [All] p10: connectstyle=Relief reliefconductorwidth=10 reliefentries=4 polygonreliefangle="90 Angle" airgapwidth=10
RoomDefinition VALIX_Font14 [InComponentClass('VALIX_Font14')] p1: confinementstyle=ConfineOut formatcopy=TRUE lockcomponents=FALSE outline 8130,3560 8840,3560 8840,5360 8130,5360
RoutingVias [All] p1: holewidth=6 width=18 viastyle="Through Hole" minholewidth=5 minwidth=10 maxholewidth=24 maxwidth=50
ShortCircuit ShortCircuit_1 [IsPad and InNet('No Net') vs IsVia and InNet('No Net')] p1: allowed=TRUE
ShortCircuit [All] p2: allowed=FALSE
SolderMaskExpansion [All] p1: expansion=4
Width [All] p1: maxlimit=100 minlimit=5 preferedwidth=10
25 further rules are at their usual default settings.

## Classes and differential pairs
differential pair USB: +USB_P -USB_N

## Components (designator, comment, footprint, x,y, rotation, side; value= is the part's Value field where it differs from the comment)
C1 "Cap 1.0uF 6.3V 0402 X7R" CC0402_P56_TLH 4062.83,2165.72 r270 top
C2 "Cap 1.0uF 6.3V 0402 X7R" CC0402_P56_TLH 3873.85,2165.72 r270 top
C3 "Cap 1.0uF 6.3V 0402 X7R" CC0402_P56_TLH 4094.39,2841.81 r90 top
C4 "Cap 22uF 10V 1210 X7R" CC1210_H1P6_20151019 1900,2350 r0 top
C5 "Cap 22uF 10V 1210 X7R" CC1210_H1P6_20151019 1900,2850 r0 top
C6 "Cap 10uF 10V 0805 X7R" CC0805_P94H_TLH 2017.72,2716.54 r90 top
C7 "Cap 10uF 10V 0805 X7R" CC0805_P94H_TLH 2244.09,2814.96 r270 top
C8 "Cap 10uF 10V 0805 X7R" CC0805_P94H_TLH 2599.41,2763.78 r0 top
C9 "Cap 10uF 10V 0805 X7R" CC0805_P94H_TLH 2924.21,2760.83 r0 top
C10 "Cap 2.2uF 25V 0805 X7R" CC0805_P94H_TLH 2749.02,2764.76 r180 top
C11 "Cap 2.2uF 25V 0805 X7R" CC0805_P94H_TLH 3084.65,2761.81 r180 top
C12 "Cap 10uF 10V 0805 X7R" CC0805_P94H_TLH 1205,1785 r180 top
C13 "Cap 0.01uF 50V 0402 X7R" CC0402_P56_TLH 2832.09,2640.95 r0 top
C14 "Cap 0.01uF 50V 0402 X7R" CC0402_P56_TLH 3162.4,2639.76 r0 top
C15 "Cap 0.01uF 50V 0402 X7R" CC0402_P56_TLH 2832.09,2680.95 r0 top
C16 "Cap 0.01uF 50V 0402 X7R" CC0402_P56_TLH 3162.4,2677.17 r0 top
C17 "Cap 22uF 10V 1206 X7R" C1206 2027.56,2480.32 r270 top
C18 "Cap 10uF 10V 0805 X7R" CC0805_P94H_TLH 1560,1785 r180 top
C19 "Cap 10uF 10V 0805 X7R" CC0805_P94H_TLH 2332.68,2814.96 r270 top
C20 "Cap 10uF 10V 0805 X7R" CC0805_P94H_TLH 2517.72,2515.75 r90 top
C21 "Cap 0.001uF 50V 0402 X7R" CC0402_P56_TLH 2309.06,2460.63 r90 top
C22 "Cap 10uF 10V 0805 X7R" CC0805_P94H_TLH 1915,1785 r180 top
C23 "Cap 0.1uF 50V 0402 X7R" CC0402_P56_TLH 1750,2825 r90 top
C24 "Cap 0.1uF 50V 0402 X7R" CC0402_P56_TLH 1753.94,2375 r270 top
C25 "Cap 0.01uF 50V 0402 X7R" CC0402_P56_TLH 2236.22,2566.93 r90 top
C26 "Cap 2.2uF 25V 0805 X7R" CC0805_P94H_TLH 1980,1950 r90 top
C27 "Cap 1.0uF 6.3V 0402 X7R" CC0402_P56_TLH 3091.55,1217.2 r270 top
C28 "Cap 1.0uF 6.3V 0402 X7R" CC0402_P56_TLH 2935.96,2331.46 r90 top
C29 "Cap 1.0uF 6.3V 0402 X7R" CC0402_P56_TLH 3034.39,2331.46 r90 top
C30 "Cap 1.0uF 6.3V 0402 X7R" CC0402_P56_TLH 3083.6,2331.46 r90 top
C31 "Cap 1.0uF 6.3V 0402 X7R" CC0402_P56_TLH 2080,1196.73 r270 top
C32 "Cap 1.0uF 6.3V 0402 X7R" CC0402_P56_TLH 3073.76,1455.47 r270 top
C33 "Cap 1.0uF 6.3V 0402 X7R" CC0402_P56_TLH 3024.54,1455.47 r270 top
C34 "Cap 1.0uF 6.3V 0402 X7R" CC0402_P56_TLH 2971.39,1455.47 r270 top
C35 "Cap 47pF 50V 0402 NPO" CC0402_P56_TLH 1275,2420 r0 top
C36 "Cap 1.0uF 6.3V 0402 X7R" CC0402_P56_TLH 3897,1937 r270 top
C37 "Cap 1.0uF 6.3V 0402 X7R" CC0402_P56_TLH 4111,1933 r270 top
C38 "Cap 1.0uF 6.3V 0402 X7R" CC0402_P56_TLH 2886.91,2331.33 r90 top
C39 "Cap 1.0uF 6.3V 0402 X7R" CC0402_P56_TLH 3182.02,2331.46 r90 top
C40 "Cap 1.0uF 6.3V 0402 X7R" CC0402_P56_TLH 3172.18,1455.47 r270 top
C41 "Cap 1.0uF 6.3V 0402 X7R" CC0402_P56_TLH 2877.12,1454.47 r270 top
C42 "Cap 1.0uF 6.3V 0402 X7R" CC0402_P56_TLH 4250.06,1232 r270 top
C43 "Cap 1.0uF 6.3V 0402 X7R" CC0402_P56_TLH 3836,1233 r270 top
C44 "Cap 1.0uF 6.3V 0402 X7R" CC0402_P56_TLH 3680,1660 r180 top
C45 "Cap 1.0uF 6.3V 0402 X7R" CC0402_P56_TLH 4407,1504 r0 top
C46 "Cap 1.0uF 6.3V 0402 X7R" CC0402_P56_TLH 3680,1560 r180 top
C47 "Cap 1.0uF 6.3V 0402 X7R" CC0402_P56_TLH 4015,1233 r270 top
C48 "Cap 1.0uF 6.3V 0402 X7R" CC0402_P56_TLH 3876,1233 r270 top
C49 "Cap 1.0uF 6.3V 0402 X7R" CC0402_P56_TLH 4408,1619.72 r0 top
C50 "Cap 47pF 50V 0402 NPO" CC0402_P56_TLH 1095,2315 r270 top
C51 "Cap 1.0uF 6.3V 0402 X7R" CC0402_P56_TLH 1300,2125 r270 top
C52 "Cap 1.0uF 6.3V 0402 X7R" CC0402_P56_TLH 2814.9,2330.47 r90 top
C53 "Cap 1.0uF 6.3V 0402 X7R" CC0402_P56_TLH 3132.81,2331.46 r90 top
C54 "Cap 1.0uF 6.3V 0402 X7R" CC0402_P56_TLH 3487.14,1947.6 r0 top
C55 "Cap 1.0uF 6.3V 0402 X7R" CC0402_P56_TLH 3487.14,1898.39 r0 top
C56 "Cap 1.0uF 6.3V 0402 X7R" CC0402_P56_TLH 4656.5,1510.83 r0 top
C57 "Cap 10uF 10V 0805 X7R" CC0805_P94H_TLH 5175.2,2256.89 r90 top
C58 "Cap 47pF 50V 0402 NPO" CC0402_P56_TLH 1225,2140 r0 top
C59 "Cap 1.0uF 6.3V 0402 X7R" CC0402_P56_TLH 4408,1659 r0 top
C60 "Cap 1.0uF 6.3V 0402 X7R" CC0402_P56_TLH 3487.57,1849.67 r0 top
C61 "Cap 1.0uF 6.3V 0402 X7R" CC0402_P56_TLH 2768.57,2330.67 r90 top
C62 "Cap 1.0uF 6.3V 0402 X7R" CC0402_P56_TLH 3487.14,1799.96 r0 top
C63 "Cap 1.0uF 6.3V 0402 X7R" CC0402_P56_TLH 3230.57,1455.67 r270 top
C64 "Cap 1.0uF 6.3V 0402 X7R" CC0402_P56_TLH 2824.91,1455.47 r270 top
C65 "Cap 47pF 50V 0402 NPO" CC0402_P56_TLH 1135,2210 r90 top
C66 "Cap 1.0uF 6.3V 0402 X7R" CC0402_P56_TLH 2561.94,1782.24 r180 top
C67 "Cap 1.0uF 6.3V 0402 X7R" CC0402_P56_TLH 2561.94,1839.33 r180 top
C68 "Cap 1.0uF 6.3V 0402 X7R" CC0402_P56_TLH 2561.94,1888.54 r180 top
C69 "Cap 1.0uF 6.3V 0402 X7R" CC0402_P56_TLH 2561.94,1937.76 r180 top
C70 "Cap 47pF 50V 0402 NPO" CC0402_P56_TLH 1565,2375 r0 top
C71 "Cap 1.0uF 6.3V 0402 X7R" CC0402_P56_TLH 3313.98,2331.69 r90 top
C72 "Cap 1.0uF 6.3V 0402 X7R" CC0402_P56_TLH 4659.45,1562.01 r0 top
C73 "Cap 47pF 50V 0402 NPO" CC0402_P56_TLH 1420,2310 r270 top
C74 "Cap 1.0uF 6.3V 0402 X7R" CC0402_P56_TLH 1590,2120 r270 top
C75 "Cap 1.0uF 6.3V 0402 X7R" CC0402_P56_TLH 1850,2230 r90 top
C76 "Cap 1.0uF 6.3V 0402 X7R" CC0402_P56_TLH 4336.61,1193.9 r90 top
C77 "Cap 47pF 50V 0402 NPO" CC0402_P56_TLH 1510,2135 r0 top
C78 "Cap 1.0uF 6.3V 0402 X7R" CC0402_P56_TLH 2459.65,2544.29 r90 top
C79 "Cap 47pF 50V 0402 NPO" CC0402_P56_TLH 1420,2205 r90 top
D1 "Diode 40V 3A" SMA_SOICJ127P600-8N 2125.98,2775.59 r270 top
D2 "Diode 40V 3A" SMA_SOICJ127P600-8N 2568.9,2883.86 r0 top
D3 "SML-P11MT" "CC0402_P56_TLH - LED" 2192.91,2476.38 r90 top
HD1 "Conn Recept 8x2x0.1 TH SSW" "CONN RECEPT 8X2X8P35 0P1PH TH" 1600,1955 r0 top
J1 "Conn PWR 2.0 5A 24V TH Barrel" KLD-0202 1000,2700 r0 top
J2 "Header 2x2 100Pitch" HEADER_2X2X0P100E 2165,1955 r90 top
JTAG1 "Header 2x5 100Pitch" HEADER_2X5_100X100 2225,1346.73 r90 top
L1 "FB 0.5A 80mohm 0402" CHIP2PINSM127P600-8N_TLH20150921 2985.17,2331.46 r270 top
L2 "FB 0.5A 80mohm 0402" CHIP2PINSM127P600-8N_TLH20150921 3231.24,2331.46 r270 top
L3 "FB 0.5A 80mohm 0402" CHIP2PINSM127P600-8N_TLH20150921 2721.57,2331.58 r270 top
L4 "FB 0.5A 80mohm 0402" CHIP2PINSM127P600-8N_TLH20150921 3275.59,2330.71 r270 top
LED1 "LED RGB" LED_RGB_1P5X1P0X0P2_6PIN_SON57P100X256N 2527.48,1116.54 r90 top
LED2 "LED RGB" LED_RGB_1P5X1P0X0P2_6PIN_SON57P100X256N 2657.48,1116.54 r90 top
LED3 "LED RGB" LED_RGB_1P5X1P0X0P2_6PIN_SON57P100X256N 2787.48,1116.54 r90 top
PMOD1 "Conn Recept 6x2x0.1 TH SSW" "CONN RECEPT 6X2X8P35 0P1PH TH" 1205,1400 r270 top
PMOD2 "Conn Recept 6x2x0.1 TH SSW" "CONN RECEPT 6X2X8P35 0P1PH TH" 1555,1400 r270 top
PMOD3 "Conn Recept 6x2x0.1 TH SSW" "CONN RECEPT 6X2X8P35 0P1PH TH" 1910,1400 r270 top
R1 "324K" CC0402_P56_TLH 1653.94,2375 r270 top
R2 "61.9K" CC0402_P56_TLH 2267.72,2460.63 r90 top
R3 "60.4K" CC0402_P56_TLH 1703.94,2375 r270 top
R4 "13.3K" CC0402_P56_TLH 1700,2825 r90 top
R5 "715" CC0402_P56_TLH 2192.91,2566.93 r270 top
R6 "280K" CC0402_P56_TLH 2350.39,2460.63 r270 top
R7 "150" CC0402_P56_TLH 2236.22,2688.98 r270 top
R8 "100" CC0402_P56_TLH 2487.48,1216.54 r90 top
R9 "392" CC0402_P56_TLH 2527.48,1216.54 r90 top
R10 "100" CC0402_P56_TLH 2567.48,1216.54 r90 top
R11 "100" CC0402_P56_TLH 2617.48,1216.54 r90 top
R12 "392" CC0402_P56_TLH 2657.48,1216.54 r90 top
R13 "100" CC0402_P56_TLH 2697.48,1216.54 r90 top
R14 "100" CC0402_P56_TLH 2747.48,1216.54 r90 top
R15 "392" CC0402_P56_TLH 2787.48,1216.54 r90 top
R16 "1.0K" CC0402_P56_TLH 1275,2380 r0 top
R17 "100" CC0402_P56_TLH 2827.48,1216.54 r90 top
R18 "1.0K" CC0402_P56_TLH 1115,2420 r0 top
R19 "1.0K" CC0402_P56_TLH 1115,2380 r0 top
R20 "1.0K" CC0402_P56_TLH 1135,2315 r270 top
R21 "1.0K" CC0402_P56_TLH 1225,2100 r0 top
R22 "1.0K" CC0402_P56_TLH 1135,2120 r90 top
R23 "1.0K" CC0402_P56_TLH 1095,2120 r90 top
R24 "1.0K" CC0402_P56_TLH 1095,2210 r90 top
R25 "2.21K" CC0402_P56_TLH 4408,1699 r180 top
R26 "10K" CC0402_P56_TLH 4407,1541 r180 top
R27 "1.0K" CC0402_P56_TLH 1565,2415 r0 top
R28 "10K" CC0402_P56_TLH 4212.06,1232 r90 top
R29 "10K" CC0402_P56_TLH 4174.06,1232 r90 top
R30 "10K" CC0402_P56_TLH 4099.41,1231.3 r90 top
R31 "1.0K" CC0402_P56_TLH 1400,2415 r0 top
R32 "1.0K" CC0402_P56_TLH 1400,2375 r0 top
R33 "2.21K" CC0402_P56_TLH 4061.02,1231.3 r270 top
R34 "1.0K" CC0402_P56_TLH 1380,2310 r270 top
R35 "150" CC0402_P56_TLH 1850,2120 r270 top
R36 "1.0K" CC0402_P56_TLH 1510,2095 r0 top
R37 "1.0K" CC0402_P56_TLH 1420,2115 r90 top
R38 "500" "RES_ POT_3PIN_318X231X416_BOURNS3223W" 2110,2170 r0 top
R39 "1.0K" CC0402_P56_TLH 1380,2115 r90 top
R40 "1.0K" CC0402_P56_TLH 1380,2205 r90 top
R41 "12.4k" CC0402_P56_TLH 2225,2142 r90 top
U1 "10M08DA" BGA256C100P16X16_1700X1700X155 3034.39,1888.54 r0 top
U2 "LTM4622" LGA25C127P5X5_625X625X182_20131105 1800,2600 r180 top
U3 "LT3060EDC-1.2" DFN8_2X3_SON45P300X80_HS-9N 2673.23,2666.34 r180 top
U4 "LT3060EDC-2.5" DFN8_2X3_SON45P300X80_HS-9N 3004.92,2666.34 r180 top
U5 "MR0A16A" TSOP44_80P1180X120-44N 4078.57,2492.5 r270 top
U6 "LT3065-adj" DFN10_SON50P300X80_HS-11N_TLH_20151107 2350.39,2618.11 r270 top
U7 "50MHz" SON254P500X85_HS-7N_OSS 3271.55,1207.2 r90 top
U8 "LT6014CDD" DFN8_3X3_SON50P300X80_HS-9N_20151201 1235,2270 r270 top
U9 "LT6014CDD" DFN8_3X3_SON50P300X80_HS-9N_20151201 1524.53,2264.57 r270 top
U10 "93LC46B" SO-G6/E2.4 4167.32,1099.41 r270 top
U11 "25MHz" SON254P500X85_HS-7N_OSS 4479.33,1295.28 r180 top
U12 "LT6014CDD" DFN8_3X3_SON50P300X80_HS-9N_20151201 1740,2170 r90 top
U13 "SPX432" SOT23_SOT95P245X112-3N_20151202 1950,2130 r0 top
U14 "IC FT2232HL-Tray" LQFP-64_N 4023.62,1590.55 r180 top
USB1 "Conn USB A TH RT" "CONNECTOR USB A 4PIN PLUG RT" 5300,2140 r270 top

## Footprints (in the part's own frame and the unit in brackets; to place one, negate y for a bottom-side part, rotate by r counter-clockwise, add the part's x,y. Pads: shape width x height; smd on the part's side, far side on the other; paste and mask are expansions set on the pad)
BGA256C100P16X16_1700X1700X155 [mm] "BGA, 256-Leads, Body 17.00x17.00mmx1.55mm, Pitch 1.00mm"
  round 0.45 smd: A1(-7.5,7.5) A2(-6.5,7.5) A3(-5.5,7.5) A4(-4.5,7.5) A5(-3.5,7.5) A6(-2.5,7.5) A7(-1.5,7.5) A8(-0.5,7.5) A9(0.5,7.5) A10(1.5,7.5) A11(2.5,7.5) A12(3.5,7.5) A13(4.5,7.5) A14(5.5,7.5) A15(6.5,7.5) A16(7.5,7.5) B1(-7.5,6.5) B2(-6.5,6.5) B3(-5.5,6.5) B4(-4.5,6.5) B5(-3.5,6.5) B6(-2.5,6.5) B7(-1.5,6.5) B8(-0.5,6.5) B9(0.5,6.5) B10(1.5,6.5) B11(2.5,6.5) B12(3.5,6.5) B13(4.5,6.5) B14(5.5,6.5) B15(6.5,6.5) B16(7.5,6.5) C1(-7.5,5.5) C2(-6.5,5.5) C3(-5.5,5.5) C4(-4.5,5.5) C5(-3.5,5.5) C6(-2.5,5.5) C7(-1.5,5.5) C8(-0.5,5.5) C9(0.5,5.5) C10(1.5,5.5) C11(2.5,5.5) C12(3.5,5.5) C13(4.5,5.5) C14(5.5,5.5) C15(6.5,5.5) C16(7.5,5.5) D1(-7.5,4.5) D2(-6.5,4.5) D3(-5.5,4.5) D4(-4.5,4.5) D5(-3.5,4.5) D6(-2.5,4.5) D7(-1.5,4.5) D8(-0.5,4.5) D9(0.5,4.5) D10(1.5,4.5) D11(2.5,4.5) D12(3.5,4.5) D13(4.5,4.5) D14(5.5,4.5) D15(6.5,4.5) D16(7.5,4.5) E1(-7.5,3.5) E2(-6.5,3.5) E3(-5.5,3.5) E4(-4.5,3.5) E5(-3.5,3.5) E6(-2.5,3.5) E7(-1.5,3.5) E8(-0.5,3.5) E9(0.5,3.5) E10(1.5,3.5) E11(2.5,3.5) E12(3.5,3.5) E13(4.5,3.5) E14(5.5,3.5) E15(6.5,3.5) E16(7.5,3.5) F1(-7.5,2.5) F2(-6.5,2.5) F3(-5.5,2.5) F4(-4.5,2.5) F5(-3.5,2.5) F6(-2.5,2.5) F7(-1.5,2.5) F8(-0.5,2.5) F9(0.5,2.5) F10(1.5,2.5) F11(2.5,2.5) F12(3.5,2.5) F13(4.5,2.5) F14(5.5,2.5) F15(6.5,2.5) F16(7.5,2.5) G1(-7.5,1.5) G2(-6.5,1.5) G3(-5.5,1.5) G4(-4.5,1.5) G5(-3.5,1.5) G6(-2.5,1.5) G7(-1.5,1.5) G8(-0.5,1.5) G9(0.5,1.5) G10(1.5,1.5) G11(2.5,1.5) G12(3.5,1.5) G13(4.5,1.5) G14(5.5,1.5) G15(6.5,1.5) G16(7.5,1.5) H1(-7.5,0.5) H2(-6.5,0.5) H3(-5.5,0.5) H4(-4.5,0.5) H5(-3.5,0.5) H6(-2.5,0.5) H7(-1.5,0.5) H8(-0.5,0.5) H9(0.5,0.5) H10(1.5,0.5) H11(2.5,0.5) H12(3.5,0.5) H13(4.5,0.5) H14(5.5,0.5) H15(6.5,0.5) H16(7.5,0.5) J1(-7.5,-0.5) J2(-6.5,-0.5) J3(-5.5,-0.5) J4(-4.5,-0.5) J5(-3.5,-0.5) J6(-2.5,-0.5) J7(-1.5,-0.5) J8(-0.5,-0.5) J9(0.5,-0.5) J10(1.5,-0.5) J11(2.5,-0.5) J12(3.5,-0.5) J13(4.5,-0.5) J14(5.5,-0.5) J15(6.5,-0.5) J16(7.5,-0.5) K1(-7.5,-1.5) K2(-6.5,-1.5) K3(-5.5,-1.5) K4(-4.5,-1.5) K5(-3.5,-1.5) K6(-2.5,-1.5) K7(-1.5,-1.5) K8(-0.5,-1.5) K9(0.5,-1.5) K10(1.5,-1.5) K11(2.5,-1.5) K12(3.5,-1.5) K13(4.5,-1.5) K14(5.5,-1.5) K15(6.5,-1.5) K16(7.5,-1.5) L1(-7.5,-2.5) L2(-6.5,-2.5) L3(-5.5,-2.5) L4(-4.5,-2.5) L5(-3.5,-2.5) L6(-2.5,-2.5) L7(-1.5,-2.5) L8(-0.5,-2.5) L9(0.5,-2.5) L10(1.5,-2.5) L11(2.5,-2.5) L12(3.5,-2.5) L13(4.5,-2.5) L14(5.5,-2.5) L15(6.5,-2.5) L16(7.5,-2.5) M1(-7.5,-3.5) M2(-6.5,-3.5) M3(-5.5,-3.5) M4(-4.5,-3.5) M5(-3.5,-3.5) M6(-2.5,-3.5) M7(-1.5,-3.5) M8(-0.5,-3.5) M9(0.5,-3.5) M10(1.5,-3.5) M11(2.5,-3.5) M12(3.5,-3.5) M13(4.5,-3.5) M14(5.5,-3.5) M15(6.5,-3.5) M16(7.5,-3.5) N1(-7.5,-4.5) N2(-6.5,-4.5) N3(-5.5,-4.5) N4(-4.5,-4.5) N5(-3.5,-4.5) N6(-2.5,-4.5) N7(-1.5,-4.5) N8(-0.5,-4.5) N9(0.5,-4.5) N10(1.5,-4.5) N11(2.5,-4.5) N12(3.5,-4.5) N13(4.5,-4.5) N14(5.5,-4.5) N15(6.5,-4.5) N16(7.5,-4.5) P1(-7.5,-5.5) P2(-6.5,-5.5) P3(-5.5,-5.5) P4(-4.5,-5.5) P5(-3.5,-5.5) P6(-2.5,-5.5) P7(-1.5,-5.5) P8(-0.5,-5.5) P9(0.5,-5.5) P10(1.5,-5.5) P11(2.5,-5.5) P12(3.5,-5.5) P13(4.5,-5.5) P14(5.5,-5.5) P15(6.5,-5.5) P16(7.5,-5.5) R1(-7.5,-6.5) R2(-6.5,-6.5) R3(-5.5,-6.5) R4(-4.5,-6.5) R5(-3.5,-6.5) R6(-2.5,-6.5) R7(-1.5,-6.5) R8(-0.5,-6.5) R9(0.5,-6.5) R10(1.5,-6.5) R11(2.5,-6.5) R12(3.5,-6.5) R13(4.5,-6.5) R14(5.5,-6.5) R15(6.5,-6.5) R16(7.5,-6.5) T1(-7.5,-7.5) T2(-6.5,-7.5) T3(-5.5,-7.5) T4(-4.5,-7.5) T5(-3.5,-7.5) T6(-2.5,-7.5) T7(-1.5,-7.5) T8(-0.5,-7.5) T9(0.5,-7.5) T10(1.5,-7.5) T11(2.5,-7.5) T12(3.5,-7.5) T13(4.5,-7.5) T14(5.5,-7.5) T15(6.5,-7.5) T16(7.5,-7.5)
  silkscreen extent -9.27,-8.5 8.5,8.5, body extent -8.5,-8.5 8.5,8.5, height 1.55
C1206 [mm]
  rect 1.15x1.8 smd: 1(-1.524,0) 2(1.524,0)
  silkscreen extent -2.3,-1.1 2.3,1.1, body extent -1.6,-0.8 1.6,0.8, height 0.55
CC0402_P56_TLH [mm] "Chip Capacitor, 2-Leads, Body 1.0x0.50x0.56mm, IPC Low Density"
  rect 0.62x0.62 smd: 1(-0.55,0) 2(0.55,0)
  silkscreen extent -1.02,-0.41 1.02,0.41, body extent -0.55,-0.3 0.55,0.3, height 0.56
"CC0402_P56_TLH - LED" [mm] "LED, 2-Leads, Body 1.0x0.50x0.56mm, IPC Low Density"
  rect 0.6x0.5 smd: 1(-0.55,0) 2(0.55,0)
  silkscreen extent -1.02,-0.41 1.02,0.41, body extent -0.5,-0.25 0.5,0.25, height 0.16
CC0805_P94H_TLH [mm] "Cap 0805 0p94 high"
  rect 1.15x1.45 smd: 1(-1,0) 2(1,0)
  silkscreen extent -1.7,-0.9 1.7,0.9, body extent -1.11,-0.72 1.1,0.72, height 0.94
CC1210_H1P6_20151019 [mm] "CC1210H1.6 Chip2PinSM127P600-8N"
  rect 1.4x2.8 smd: 1(-1.4,0) 2(1.4,0)
  silkscreen extent -2.25,-1.63 2.27,1.68, body extent -1.6,-1.35 1.6,1.35, height 1.7
CHIP2PINSM127P600-8N_TLH20150921 [mm] "Chip 0402 inductor"
  rect 0.59x0.62 smd: 1(-0.455,0) 2(0.455,0)
  silkscreen extent -0.9,-0.45 0.9,0.45, body extent -0.53,-0.28 0.53,0.27, height 0.55
"CONN RECEPT 6X2X8P35 0P1PH TH" [mil] "Conn Recept 6x2x8p35 0p1PH TH Samtec SSW"
  rect 60x60 hole 40.94: 1(250,-50)
  round 60 hole 40.94: 2(250,50) 3(150,-50) 4(150,50) 5(50,-50) 6(50,50) 7(-50,-50) 8(-50,50) 9(-150,-50) 10(-150,50) 11(-250,-50) 12(-250,50)
  silkscreen extent -315,-101 315,103, body extent -310,-97 310,98, height 335
"CONN RECEPT 8X2X8P35 0P1PH TH" [mil] "Conn Recept 8x2x8p35 0p1PH TH Samtec SSW"
  rect 60x60 hole 40.94: 1(250,-50)
  round 60 hole 40.94: 2(250,50) 3(150,-50) 4(150,50) 5(50,-50) 6(50,50) 7(-50,-50) 8(-50,50) 9(-150,-50) 10(-150,50) 11(-250,-50) 12(-250,50) 13(-350,-50) 14(-350,50) 15(-450,-50) 16(-450,50)
  silkscreen extent -517,-103 315,103, body extent -510,-97 310,98, height 335
"CONNECTOR USB A 4PIN PLUG RT" [mm] "Connector USB A 4Pin Plug RT"
  round 1.25 hole 1.25 unplated: 0(1.25,2.1) 0(5.75,2.1)
  round 1.5 hole 1: 1(0,0) 2(2.5,0) 3(4.5,0) 4(7,0)
  oval 1.524x3 hole 1 slot 2.5 at 90 deg: G1(-2,2.1) G2(9,2.1)
  silkscreen extent -3.5,-1.6 10.55,4.65, body extent -2.79,-0.11 9.9,19.92, height 4.51
DFN8_2X3_SON45P300X80_HS-9N [mm] "SON, 8-Leads, Body 2.00x3.00mm, Pitch 0.45mm, Thermal Pad 2.38x1.49mm, IPC Medium Density"
  rect 0.7x0.25 smd: 1(-1.4,0.675) 2(-1.4,0.225) 3(-1.4,-0.225) 4(-1.4,-0.675) 5(1.4,-0.675) 6(1.4,-0.225) 7(1.4,0.225) 8(1.4,0.675)
  rect 1.5x1.35 smd: 9(0,0)
  silkscreen extent -2,-1.07 1.55,1.25, body extent -1.55,-1.05 1.55,1.05, height 0.8
DFN8_3X3_SON50P300X80_HS-9N_20151201 [mm] "SON, 8-Leads, Body 3.00x3.00mm, Pitch 0.50mm, Thermal Pad 2.80x1.80mm, IPC Medium Density"
  rect 0.675x0.25 smd: 1(-1.425,0.75) 2(-1.425,0.25) 3(-1.425,-0.25) 4(-1.425,-0.75) 5(1.425,-0.75) 6(1.425,-0.25) 7(1.425,0.25) 8(1.425,0.75)
  rect 1.65x2.38 smd: 9(0,0)
  silkscreen extent -2.1,-1.67 1.67,1.73, body extent -1.55,-1.55 1.55,1.55, height 0.79
DFN10_SON50P300X80_HS-11N_TLH_20151107 [mm] "SON, 10-Leads, Body 3.00x3.00mm, Pitch 0.50mm, Thermal Pad 2.38x1.49mm, IPC Medium Density"
  rect 0.7x0.25 smd: 1(-1.425,1) 2(-1.425,0.5) 3(-1.425,0) 4(-1.425,-0.5) 5(-1.425,-1) 6(1.425,-1) 7(1.425,-0.5) 8(1.425,0) 9(1.425,0.5) 10(1.45,1)
  rect 1.4x2.3 smd: 11(0,0)
  silkscreen extent -2.2,-1.7 1.75,1.75, body extent -1.6,-1.55 1.5,1.55, height 0.8
HEADER_2X2X0P100E [mil] "Header 2x2x100mil Samtec TSW standard"
  rect 60x60 hole 40: 1(-50,-50)
  round 60 hole 40: 2(-50,50) 3(50,-50) 4(50,50)
  silkscreen extent -100,-105 100,100, body extent -100,-100 100,100, height 374
HEADER_2X5_100X100 [mil] "Header 2x5 100x100 Samtec TSW standard"
  rect 60x60 hole 40: 1(-200,-50)
  round 60 hole 40: 2(-200,50) 3(-100,-50) 4(-100,50) 5(0,-50) 6(0,50) 7(100,-50) 8(100,50) 9(200,-50) 10(200,50)
  body extent -250,-100 250,100, height 621
KLD-0202 [mm] "DC Power Jack, 2.5mm, KLD Series, PCB Mount"
  oval 2x4.5 hole 1 slot 3.5 at 90 deg: 1(13.7,0)
  oval 2x4 hole 0.8 slot 3 at 90 deg: 2(7.5,0)
  oval 4x2 hole 0.8 slot 3 at 0 deg: 3(10.5,-5)
  silkscreen extent 0,-4.5 14.6,4.5, body extent -0.1,-5.28 14.35,4.27, height 11
LED_RGB_1P5X1P0X0P2_6PIN_SON57P100X256N [mm] "SON, 6-Leads, Body 1.50x1.00mm, Pitch 0.57mm, IPC Medium Density"
  rect 0.45x0.45 smd: 1(-0.35,0.57) 3(-0.35,-0.57) 4(0.35,-0.57) 6(0.35,0.57)
  rect 0.45x0.4 smd: 2(-0.35,0) 5(0.35,0)
  silkscreen extent -0.84,-0.89 0.76,1.06, body extent -0.53,-0.76 0.53,0.75, height 0.25
LGA25C127P5X5_625X625X182_20131105 [mm] "LGA, 25-Leads, Body 6.25x6.25mmx1.82mm, Pitch 1.27mm"
  round 0.63 smd: A1(-2.54,2.54) A2(-1.27,2.54) A3(0,2.54) A4(1.27,2.54) A5(2.54,2.54) B1(-2.54,1.27) B2(-1.27,1.27) B3(0,1.27) B4(1.27,1.27) B5(2.54,1.27) C1(-2.54,0) C2(-1.27,0) C3(0,0) C4(1.27,0) C5(2.54,0) D1(-2.54,-1.27) D2(-1.27,-1.27) D3(0,-1.27) D4(1.27,-1.27) D5(2.54,-1.27) E1(-2.54,-2.54) E2(-1.27,-2.54) E3(0,-2.54) E4(1.27,-2.54) E5(2.54,-2.54)
  silkscreen extent -3.25,-3.25 3.25,3.25, body extent -3.13,-3.13 3.13,3.13, height 1.82
LQFP-64_N [mm] "Thin QFP, 64-Leads, Body 10x10mm, Pitch 0.5mm, IPC Medium Density"
  oval 1.8x0.3 smd: 1(-5.55,3.75) 2(-5.55,3.25) 3(-5.55,2.75) 4(-5.55,2.25) 5(-5.55,1.75) 6(-5.55,1.25) 7(-5.55,0.75) 8(-5.55,0.25) 9(-5.55,-0.25) 10(-5.55,-0.75) 11(-5.55,-1.25) 12(-5.55,-1.75) 13(-5.55,-2.25) 14(-5.55,-2.75) 15(-5.55,-3.25) 16(-5.55,-3.75) 33(5.55,-3.75) 34(5.55,-3.25) 35(5.55,-2.75) 36(5.55,-2.25) 37(5.55,-1.75) 38(5.55,-1.25) 39(5.55,-0.75) 40(5.55,-0.25) 41(5.55,0.25) 42(5.55,0.75) 43(5.55,1.25) 44(5.55,1.75) 45(5.55,2.25) 46(5.55,2.75) 47(5.55,3.25) 48(5.55,3.75)
  oval 0.3x1.8 smd: 17(-3.75,-5.55) 18(-3.25,-5.55) 19(-2.75,-5.55) 20(-2.25,-5.55) 21(-1.75,-5.55) 22(-1.25,-5.55) 23(-0.75,-5.55) 24(-0.25,-5.55) 25(0.25,-5.55) 26(0.75,-5.55) 27(1.25,-5.55) 28(1.75,-5.55) 29(2.25,-5.55) 30(2.75,-5.55) 31(3.25,-5.55) 32(3.75,-5.55) 49(3.75,5.55) 50(3.25,5.55) 51(2.75,5.55) 52(2.25,5.55) 53(1.75,5.55) 54(1.25,5.55) 55(0.75,5.55) 56(0.25,5.55) 57(-0.25,5.55) 58(-0.75,5.55) 59(-1.25,5.55) 60(-1.75,5.55) 61(-2.25,5.55) 62(-2.75,5.55) 63(-3.25,5.55) 64(-3.75,5.55)
  silkscreen extent -5.68,-4.25 4.25,4.57, body extent -5,-5 5,5, height 1.6
"RES_ POT_3PIN_318X231X416_BOURNS3223W" [mm]
  rect 0.9x1.6 smd: 1(-1.375,-1.25) 3(1.425,-1.25)
  rect 1.3x1.3 smd: 2(0.025,1.18)
  silkscreen extent -2.11,-2.24 2.21,2.08, body extent -1.9,-1.88 2,1.64, height 4.19
SMA_SOICJ127P600-8N [mm] "SMA Diode"
  rect 2.5x1.7 smd: 1(-2,0) 2(2,0)
  silkscreen extent -2.12,-1.47 2.02,1.88, body extent -2.53,-1.46 2.75,1.46, height 2.41
SO-G6/E2.4 [mm] "Small Outline; 6 Leads; Body 3.6 x 3.6 mm, inc. leads (LxW max)"
  rect 0.55x1.45 smd: 1(-0.95,-1.35) 2(0,-1.35) 3(0.95,-1.35) 4(0.95,1.35) 5(0,1.35) 6(-0.95,1.35)
  silkscreen extent -1.57,-1.65 1.55,1.2, body extent -1.46,-1.62 1.46,1.22, height 1.12
SON254P500X85_HS-7N_OSS [mm] "SON, 6-Leads, Body 7.00x5.00mm, Pitch 2.54mm, Thermal Pad 2.80x1.80mm, IPC Medium Density"
  rect 1.45x1.45 smd: 1(-2,2.54) 2(-2,0) 3(-2,-2.54) 4(2,-2.54) 5(2,0) 6(2,2.54)
  rect 1.8x2.8 smd: 7(0,0)
  silkscreen extent -3.15,-3.85 2.88,3.9, body extent -2.55,-3.55 2.55,3.55, height 0.85
SOT23_SOT95P245X112-3N_20151202 [mm] "SOT23, 3-Leads, Body 2.92x2.45mm, Pitch 0.95mm, IPC Medium Density"
  rect 1x0.6 smd: 1(-1.2,0.95) 2(-1.2,-0.95) 3(1.2,0)
  silkscreen extent -1.32,-1.5 0.7,1.92, body extent -1.34,-1.53 1.49,1.52, height 1.2
TSOP44_80P1180X120-44N [mm] "TSOP, 44-Leads, Body 18.41x10.16mm, Pitch 0.80mm, IPC Medium Density"
  rect 1.2x0.55 smd: 1(-5.75,8.4) 2(-5.75,7.6) 3(-5.75,6.8) 4(-5.75,6) 5(-5.75,5.2) 6(-5.75,4.4) 7(-5.75,3.6) 8(-5.75,2.8) 9(-5.75,2) 10(-5.75,1.2) 11(-5.75,0.4) 12(-5.75,-0.4) 13(-5.75,-1.2) 14(-5.75,-2) 15(-5.75,-2.8) 16(-5.75,-3.6) 17(-5.75,-4.4) 18(-5.75,-5.2) 19(-5.75,-6) 20(-5.75,-6.8) 21(-5.75,-7.6) 22(-5.75,-8.4) 23(5.75,-8.4) 24(5.75,-7.6) 25(5.75,-6.8) 26(5.75,-6) 27(5.75,-5.2) 28(5.75,-4.4) 29(5.75,-3.6) 30(5.75,-2.8) 31(5.75,-2) 32(5.75,-1.2) 33(5.75,-0.4) 34(5.75,0.4) 35(5.75,1.2) 36(5.75,2) 37(5.75,2.8) 38(5.75,3.6) 39(5.75,4.4) 40(5.75,5.2) 41(5.75,6) 42(5.75,6.8) 43(5.75,7.6) 44(5.75,8.4)
  silkscreen extent -5.87,-9.25 4.75,9.35, body extent -5.15,-9.25 5.15,9.25, height 1.2

## Part data
C1 C2 C3 C27 C28 C29 C30 C31 C32 C33 C34 C36 C37 C38 C39 C40 C41 C42 C43 C44 C45 C46 C47 C48 C49 C51 C52 C53 C54 C55 C56 C59 C60 C61 C62 C63 C64 C66 C67 C68 C69 C71 C72 C74 C75 C76 C78: "Capacitor 1.0uF 6.3V 10% 0402 X7R"
C4 C5: library part "Cap 22uF 25V 1210 X7R", "Capacitor 22uF 25V 10% 1210 X7R"
C6 C7 C8 C9 C12 C18 C19 C20 C22 C57: "Capacitor 10uF 10V 10% 0805 X7R"
C10 C11 C26: library part "Cap 2.2uF 25V X7R 0805", "Capacitor 2.2uF 25V 5% 0805 X7R"
C13 C14 C15 C16 C25: "Capacitor 0.01uF 50V10% 0402 X7R"
C17: "Capacitor 22uF 10V 10% 1206 X7R"
C21: "Capacitor 0.001uF 50V10% 0402 X7R"
C23 C24: "Capacitor 0.1uF 50V 10% 0402 X7R"
C35 C50 C58 C65 C70 C73 C77 C79: "Capacitor 47pF 50V 10% 0402 NPO"
D1 D2: library part "Diode 40V 3A SMA CDBA340L-HF", "Diode 40V 3A SMA CDBA340L-HF"
D3: library part "LED Green 0402", "LED Green 0402"
HD1: library part "Conn Recept 8x2x0.1 TH SSW_1_1"
J2: library part "Header 2x2x100 Samtec TSW-07", "Header 2x2x100pitch Pin TSW"
JTAG1: library part "Header 2x5 100PH SamtecTSW_2", "Header 2x5x100pitch Pin TSW"
L1 L2 L3 L4: library part "FBead 500mA 80mohm 0402", "Ferrite Bead 500mA 80mohm 0402"
LED1 LED2 LED3: library part "LED RGB 6pin SMT 0404", "LED RGB 6pin SMT 0404"
PMOD1 PMOD2 PMOD3: library part "Conn Recept 6x2x0.1 TH SSW_1_1"
R1: library part "Res 324K 60mW 1% 0402", "Resistor 324K 60mW 1% 0402 ThickFilm"
R2: library part "Res 61.9K 60mW 1% 0402", "Resistor 61.9K 60mW 1% 0402 ThickFilm"
R3: library part "Res 60.4K 60mW 1% 0402", "Resistor 60.4K 60mW 1% 0402 ThickFilm"
R4: library part "Res 13.3K 60mW 1% 0402", "Resistor 13.3K 60mW 1% 0402 ThickFilm"
R5: library part "Res 715 60mW 1% 0402", "Resistor 715 60mW 1% 0402 ThickFilm"
R6: library part "Res 280K 60mW 1% 0402", "Resistor 280K 60mW 1% 0402 ThickFilm"
R7 R35: library part "Res 150 60mW 1% 0402", "Resistor 150 60mW 1% 0402 ThickFilm"
R8 R10 R11 R13 R14 R17: library part "Res 100 60mW 1% 0402", "Resistor 100 60mW 1% 0402 ThickFilm"
R9 R12 R15: library part "Res 392 60mW 1% 0402", "Resistor 392 60mW 1% 0402 ThickFilm"
R16 R18 R19 R20 R21 R22 R23 R24 R27 R31 R32 R34 R36 R37 R39 R40: library part "Res 1.0K 60mW 1% 0402", "Resistor 1.0K 60mW 1% 0402 ThickFilm"
R25 R33: library part "Res 2.21K 60mW 1% 0402", "Resistor 2.21K 60mW 1% 0402 ThickFilm"
R26 R28 R29 R30: library part "Res 10K 60mW 1% 0402", "Resistor 10K 60mW 1% 0402 ThickFilm"
R38: library part "Res Pot 500 11T 125mW SMT_1", "Res Pot 500 11T 125mW SMT"
R41: library part "Res 12.4k 60mW 0.1% 0402", "Resistor 12.4k 60mW 0.1% 0402 ThickFilm"
U1: library part "IC FPGA MAX10"
U2: library part "IC LTM4622 IC uModule Buck Reg Dual LGA25", "IC uModule Buck Reg Dual LGA25"
U3: library part "IC LDO 1.2V 100mA DFN-8", "IC LDO 1.2V 100mA DFN-8"
U4: library part "IC LDO 2.5V 100mA DFN-8_1", "IC LDO 2.5V 100mA DFN-8"
U5: library part "IC MRAM 64kx16bit 3p3V TSOP44", "IC MRAM 64kx16bit 3p3V TSOP44"
U6: library part "IC LT3065-adj LDO 500mA", "LT3065-adj LDO 500mA"
U7: library part "Oss 50Mz 50ppm SMT", "Oss 50MHz 50ppm SMT"
U8 U9 U12: library part "IC OP AMP DUAL LTC6014CDD DFN8", "IC OP AMP Dual LTC6014 DFN8"
U10: library part "IC 93LC46BTEOT EEPROM", "IC EEPROM Serial  SOT23 6Pin"
U11: library part "Oss 12MHz 50ppm SMT_1", "Oss 12MHz 50ppm SMT"
U13: library part "Reg 1p24V Precision Adj Shunt SPX432", "IC, Reg 1.24V Precision Adj Shunt SOT23 SPX432"
U14: "Dual High Speed USB To Multipurpose UART/FIFO IC, 64-pin LQFP, Tray"
USB1: library part "Conn USB A 4Pin TH RT", "Connector USB A 4Pin TH RT"

## Via types
v1: diameter 18, hole 10, Top Layer to Bottom Layer, 261 vias
v2: diameter 18, hole 10, Top Layer to Bottom Layer, tented top, 261 vias
v3: diameter 19.68, hole 7.87, Top Layer to Bottom Layer, 12 vias
v4: diameter 18, hole 6, Top Layer to Bottom Layer, 10 vias

## Nets (pads, with @x,y where several pads share a name; then routed paths per layer and width w, separated by ;. In a path a pad name is that pad's centre, name@x,y a point inside that pad or via, vN(x,y) a via of type N, cw(c..) or ccw(c..) an arc to the next point about the centre after c; other vN are vias at no path point)
1.2V: C10.1 L1.1 U3.3 U3.4 | length 34.4
  Top Layer w20: L1.1@2985.17,2349.37 v1(2985.17,2383.8)
  other v1: 2755.91,2704.72 2775.59,2720.47
1.8V: C42.1 C43.1 C44.1 C59.1 U14.12 U14.37 U14.49 U14.64 | length 1886.6
  Top Layer w8: C44.1@3701.65,1660 v1@3745,1660 ; v1(3745.55,1657.48) U14.37@3805.12,1659.45 ; C43.1@3836,1254.65 v1(3836,1292.03) 3875.98,1332.02 U14.49@3875.98,1372.05 ; U14.64@4171.26,1372.05 4171.26,1336.61 4183.22,1324.65 4218.35,1324.65 v1(4249,1294) ; U14.12@4242.13,1659.45 v1(4347.44,1657.48) ; C42.1@4250.06,1253.65 v1@4250.06,1292.94 ; v1@4347.89,1659 C59.1@4386.35,1659
  L3 Sig w20: v1(3745.55,1657.48) 3885.52,1657.48 4000.98,1542.02 4032.17,1510.83 v1(4249,1294) ; v1(3836,1292.03) 3836,1326.16 4020.67,1510.83 ; 4021.65,1510.83 4168.31,1657.48 v1(4347.44,1657.48)
1P2V_FPGA: C28.1 C29.1 C30.1 C32.1 C33.1 C34.1 L1.2 U1.D13 U1.F6 U1.G7 U1.G9 U1.H8 U1.H9 U1.H10 U1.J7 U1.J8 U1.J9 U1.K8 U1.K10 U1.M5 | length 595.7
  Top Layer w10: v2(2876.91,1731.06) U1.M5@2896.59,1750.75 ; v2(2916.28,1967.28) U1.F6@2935.96,1986.97 ; v2(2955.65,1849.17) U1.J7@2975.33,1868.86 ; v2(2955.65,1927.91) U1.G7@2975.33,1947.6 ; v2(2995.02,1809.8) U1.K8@3014.7,1829.49 ; v2(2995.02,1849.17) U1.J8@3014.7,1868.86 ; v2(2995.02,1888.54) U1.H8@3014.7,1908.23 ; v2(3034.39,1849.17) U1.J9@3054.07,1868.86 ; v2(3034.39,1888.54) U1.H9@3054.07,1908.23 ; v2(3034.39,1927.91) U1.G9@3054.07,1947.6 ; v2(3073.76,1809.8) U1.K10@3093.44,1829.49 ; v2(3073.76,1888.54) U1.H10@3093.44,1908.23 ; v2(3191.87,2046.02) U1.D13@3211.55,2065.71
  Top Layer w15: v1(2935.57,2278.67) 2935.96,2279.06 C28.1@2935.96,2309.8 ; C34.1@2971.39,1477.13 2971.39,1512.43 v1(2971.64,1512.67) ; L1.2@2985.17,2313.54 2985.17,2280.07 v1(2985.57,2279.67) ; C33.1@3024.54,1477.13 v1@3024.54,1511.64 ; v1(3033.57,2278.67) 3034.39,2279.48 C29.1@3034.39,2309.8 ; C32.1@3073.76,1477.13 3073.76,1511.49 3074.15,1511.88 v1(3074.95,1511.88) ; v1(3083.57,2278.67) C30.1@3083.6,2309.8
  other v1: 3024.57,1511.67
2.5V: C11.1 C75.1 L2.1 L4.1 R35.1 U4.3 U4.4 | length 573.8
  Top Layer w15: R35.1@1850,2141.65 v1(1850,2173.82) C75.1@1850,2208.35 ; L2.1@3231.24,2349.37 v1(3231.24,2389.24) 3262.34,2389.24 3275.59,2375.98 L4.1@3275.59,2348.62
  L8 Sig w10: v1@3113.19,2717.35 v1(3113.19,2717.52)
  L8 Sig w20: v1@3113.19,2717.35 v1(3097.61,2701.77) 3097.61,2606.77 3231.24,2473.15 v1(3231.24,2389.24)
2P5V_FPGA: C38.1 C39.1 C40.1 C41.1 L2.2 U1.D5 U1.E5 U1.E12 U1.L5 U1.M12 | length 311.1
  Top Layer w10: v2(2876.91,1770.43) U1.L5@2896.59,1790.12 ; v2(2876.91,2006.65) U1.E5@2896.59,2026.34 ; v2(2876.91,2046.02) U1.D5@2896.59,2065.71 ; v2(3152.5,1731.06) U1.M12@3172.18,1750.75 ; v2(3152.5,2006.65) U1.E12@3172.18,2026.34
  Top Layer w15: C41.1@2877.12,1476.13 v1@2877.12,1509 ; C38.1@2886.91,2309.68 2886.91,2275.58 v1(2886.94,2275.54) ; C40.1@3172.18,1477.13 v1(3172.18,1514.53) ; C39.1@3182.02,2309.8 3182.02,2278.22 v1(3182.57,2277.67) ; v1(3230.57,2278.67) 3231.24,2279.33 L2.2@3231.24,2313.54
  other v1: 2877.79,1509.67
3.3V: C1.1 C2.1 C3.1 C8.1 C9.1 C12.1 C18.1 C20.1 C21.1 C22.1 C27.1 C31.1 C36.2 C37.2 C45.1 C46.1 C47.1 C48.1 C49.1 C51.1 C56.1 C72.1 C74.1 C76.1 C78.1 D3.1 J2.1 J2.3 JTAG1.4 L3.1 LED1.1 LED1.2 LED1.3 LED2.1 LED2.2 LED2.3 LED3.1 LED3.2 LED3.3 PMOD1.6 PMOD1.12 PMOD2.6 PMOD2.12 PMOD3.6 PMOD3.12 R2.1 R25.1 R28.1 R29.1 R30.1 U3.5 U3.6 U3.7 U4.5 U4.6 U4.7 U5.11 U5.27 U5.33 U6.9 U6.10 U7.6 U8.8 U9.8 U10.6 U11.6 U12.8 U14.4 U14.9 U14.20 U14.31 U14.42 U14.50 U14.56 | length 2843.1
  Top Layer w10: U8.8@1264.53,2213.9 1264.53,2200.47 1265,2200 1265,2190 1275,2180 v1(1300,2180) C51.1@1300,2146.65 ; U9.8@1554.06,2208.46 1554.06,2185.94 1560,2180 v1(1590,2180) C74.1@1590,2141.65 ; U12.8@1710.47,2226.1 v1@1710.47,2277.53 ; v1(2192.91,2417.09) D3.1@2192.91,2454.72 ; v1(2267.72,2400) R2.1@2267.72,2438.98 ; C21.1@2309.06,2438.98 2309.06,2400.94 v1(2310,2400) ; LED1.1@2505.04,1102.76 LED1.2@2527.48,1102.76 LED1.3@2549.92,1102.76 v1(2590.94,1102.76) LED2.1@2635.04,1102.76 LED2.2@2657.48,1102.76 LED2.3@2679.92,1102.76 ; L3.1@2721.57,2349.5 v1@2721.57,2379.57 ; v1(2721.85,1102.76) LED3.1@2765.04,1102.76 LED3.2@2787.48,1102.76 LED3.3@2809.92,1102.76 ; C27.1@3091.55,1238.86 v4(3091.55,1286.2) 3091.81,1285.94 U7.6@3171.55,1285.94 ; C46.1@3701.65,1560 3702.68,1561.02 v1(3730.02,1561.02) U14.42@3805.12,1561.02 ; C2.1@3873.85,2187.38 3873.85,2222.28 v1(3874.39,2222.81) 3873.85,2223.35 U5.27@3873.85,2266.12 ; C48.1@3876,1254.65 3876,1307 3895.67,1326.67 U14.50@3895.67,1372.05 ; U14.31@3895.67,1809.06 v1(3895.67,1875.67) C36.2@3895.67,1914.02 ; U14.56@4013.78,1372.05 v1(4013.78,1295.22) 4015,1294 C47.1@4015,1254.65 ; C1.1@4062.83,2187.38 U5.33@4062.83,2266.12 ; U5.11@4094.32,2718.87 4094.32,2773.75 v1(4094.39,2773.81) C3.1@4094.39,2820.16 ; R30.1@4099.41,1209.65 4100.39,1208.66 4100.39,1192.91 4118.37,1174.94 v1(4174.06,1174.94) ; U14.20@4112.2,1809.06 v1(4112.2,1877.8) C37.2@4112.2,1910.14 ; R29.1@4174.06,1210.35 v1(4174.06,1174.94) ; R28.1@4212.06,1210.35 4212.06,1182.06 4204.94,1174.94 v1(4174.06,1174.94) ; U10.6@4220.47,1136.81 v1(4266.73,1136.81) ; U14.4@4242.13,1501.97 v1(4328.03,1501.97) C45.1@4383.31,1501.97 ; U14.9@4242.13,1600.39 v1(4309.06,1600.39) 4328.74,1620.08 C49.1@4386.81,1620.08 ; C76.1@4336.61,1172.24 4336.61,1156.5 4349.41,1143.7 v1(4400.59,1143.7) U11.6@4400.59,1195.28 ; R25.1@4429.65,1699 v1(4468,1699)
  Top Layer w20: C12.1@1244.37,1785 1255,1774.37 PMOD1.12@1255,1650 ; C18.1@1599.37,1785 1605,1779.37 PMOD2.12@1605,1650 ; C22.1@1954.37,1785 1960,1779.37 PMOD3.12@1960,1650 ; C31.1@2080,1218.39 2080,1231.73 2090,1241.73 2170,1241.73 JTAG1.4@2175,1246.73
  other v1: 3875.98,1307.09 4062.39,2221.81 1710,2278 2722,2380 2503.94,2437.99 2533.46,2437.99 2918.31,2675.2 2918.31,2701.77
  other v2: 2583.66,2689.96 2562.99,2710.63
3.3V_HD1: C26.1 HD1.1 HD1.7 J2.2 | length 639.7
  Top Layer w30: HD1.1@1835,1905 HD1.1@1850,1905 2110,1905 2115,1910 J2.2@2109.37,1915.63
  L8 Sig w30: HD1.7@1550,1905 1590,1945 1594,1945 1603,1954 1814,1954 1850,1918 HD1.1@1850,1905 HD1.1@1851,1904
3.3VEXT: C17.1 J2.4 U2.A1 U2.B1 | length 70.7
  Top Layer w10: v1(1875,2475) U2.A1@1900,2500 ; v1(1875,2525) U2.B1@1900,2550
  other v1: 2090.55,2535.43 2090.55,2566.93